# Altium PCB OK6410AV2.PcbDoc (part 1 of 4)
Units mm, origin at the board's own origin, x right, y up, seen from the top; angles counter-clockwise.
Board outline 144.31 x 105.28 mm, 4 copper layers (Top, GND, VCC, Bottom), stack 0.899 mm thick; 254 components, 278 nets, 1261 pads, 740 vias.
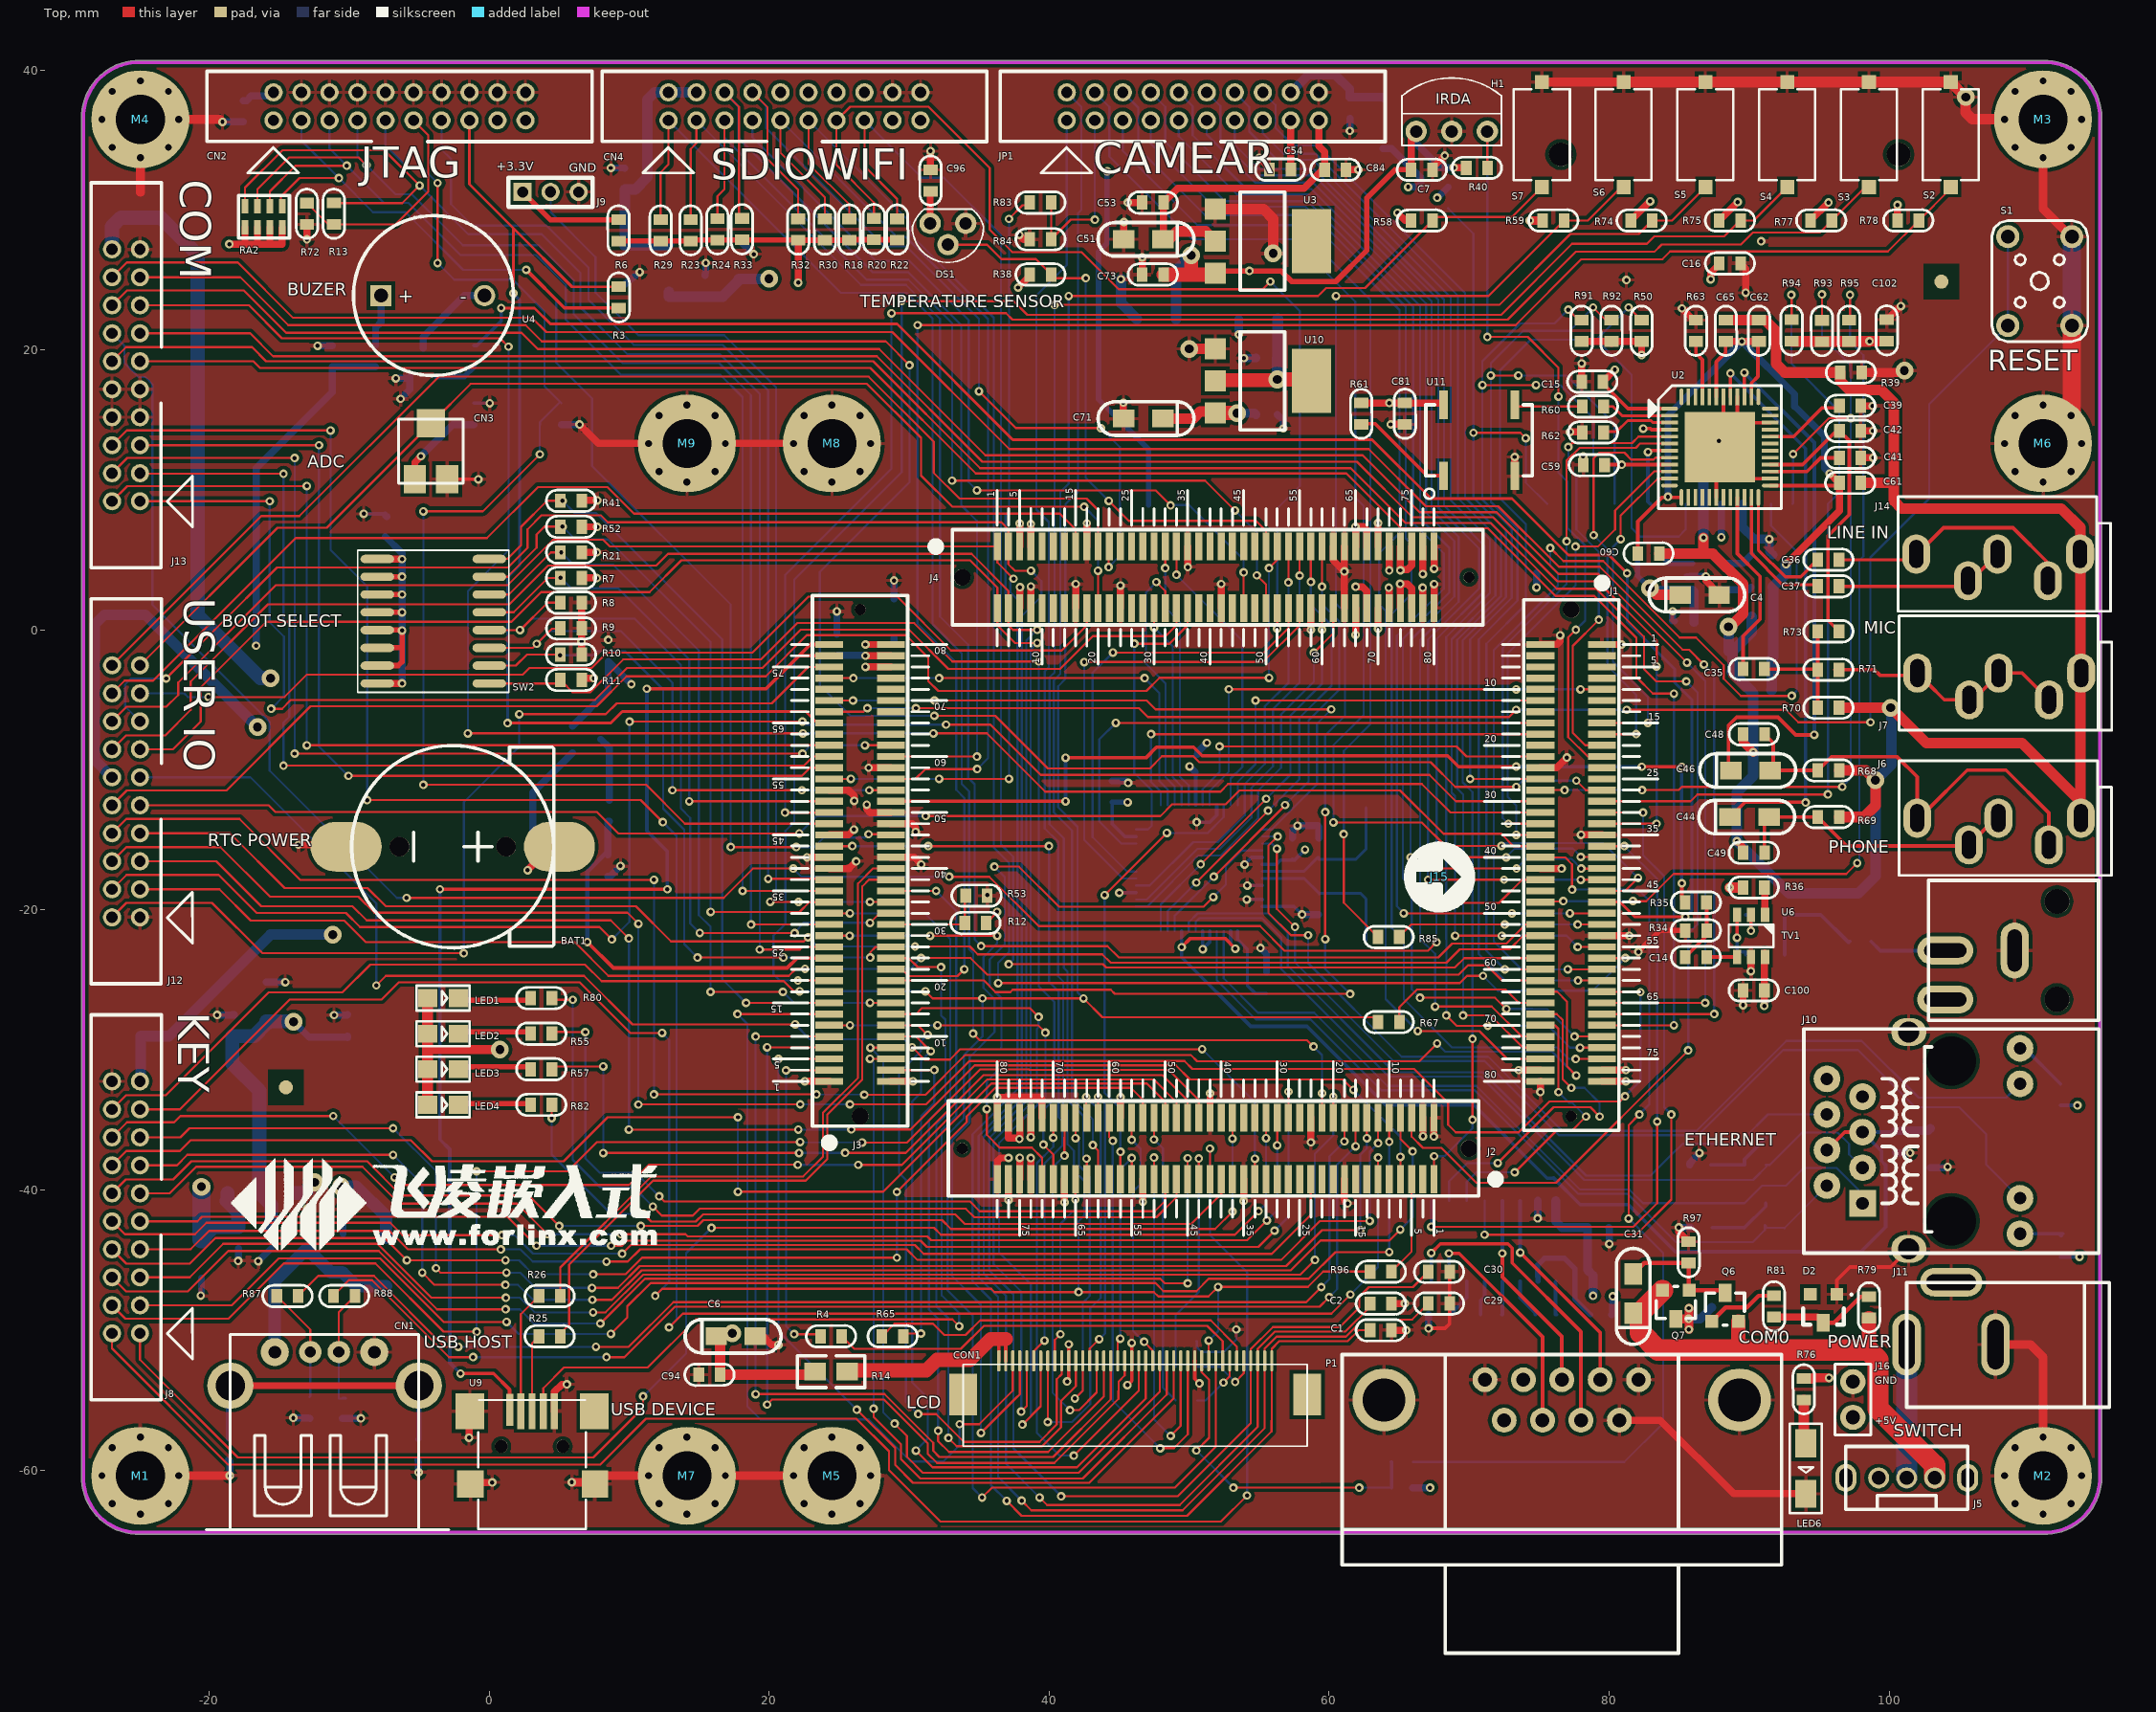
[diagram p0: Top view]
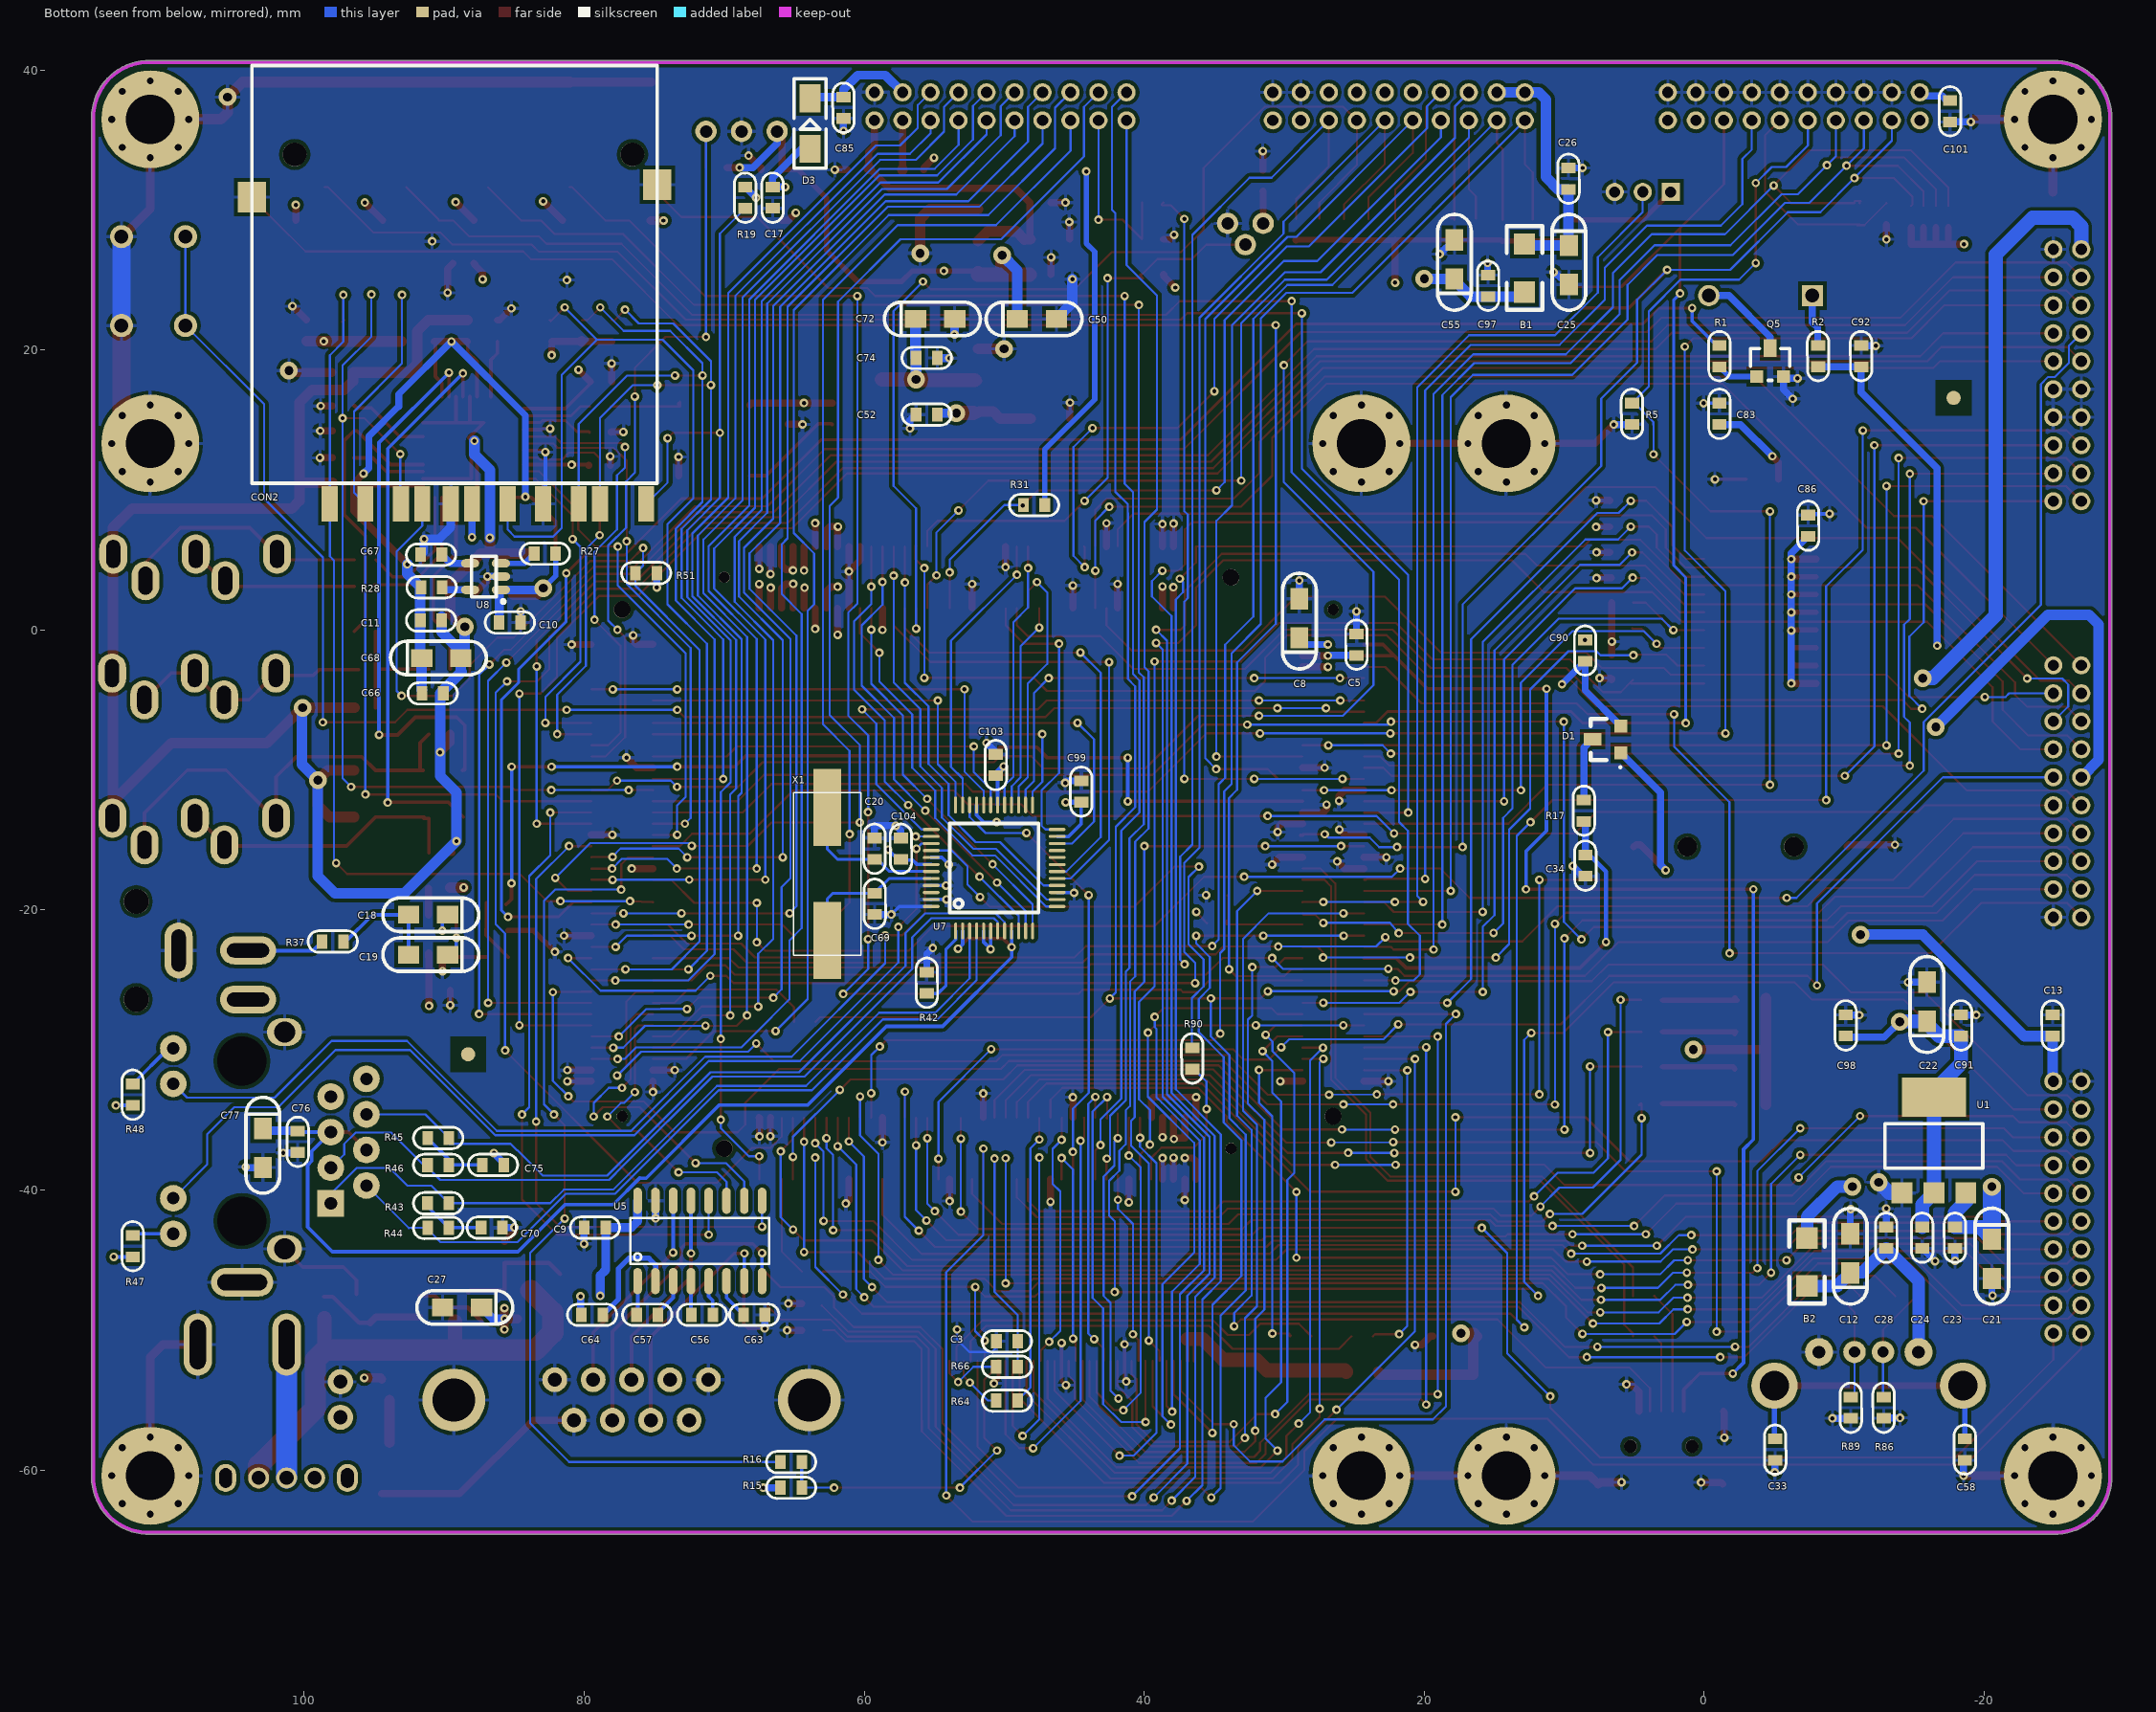
[diagram p1: Bottom view, seen from below]
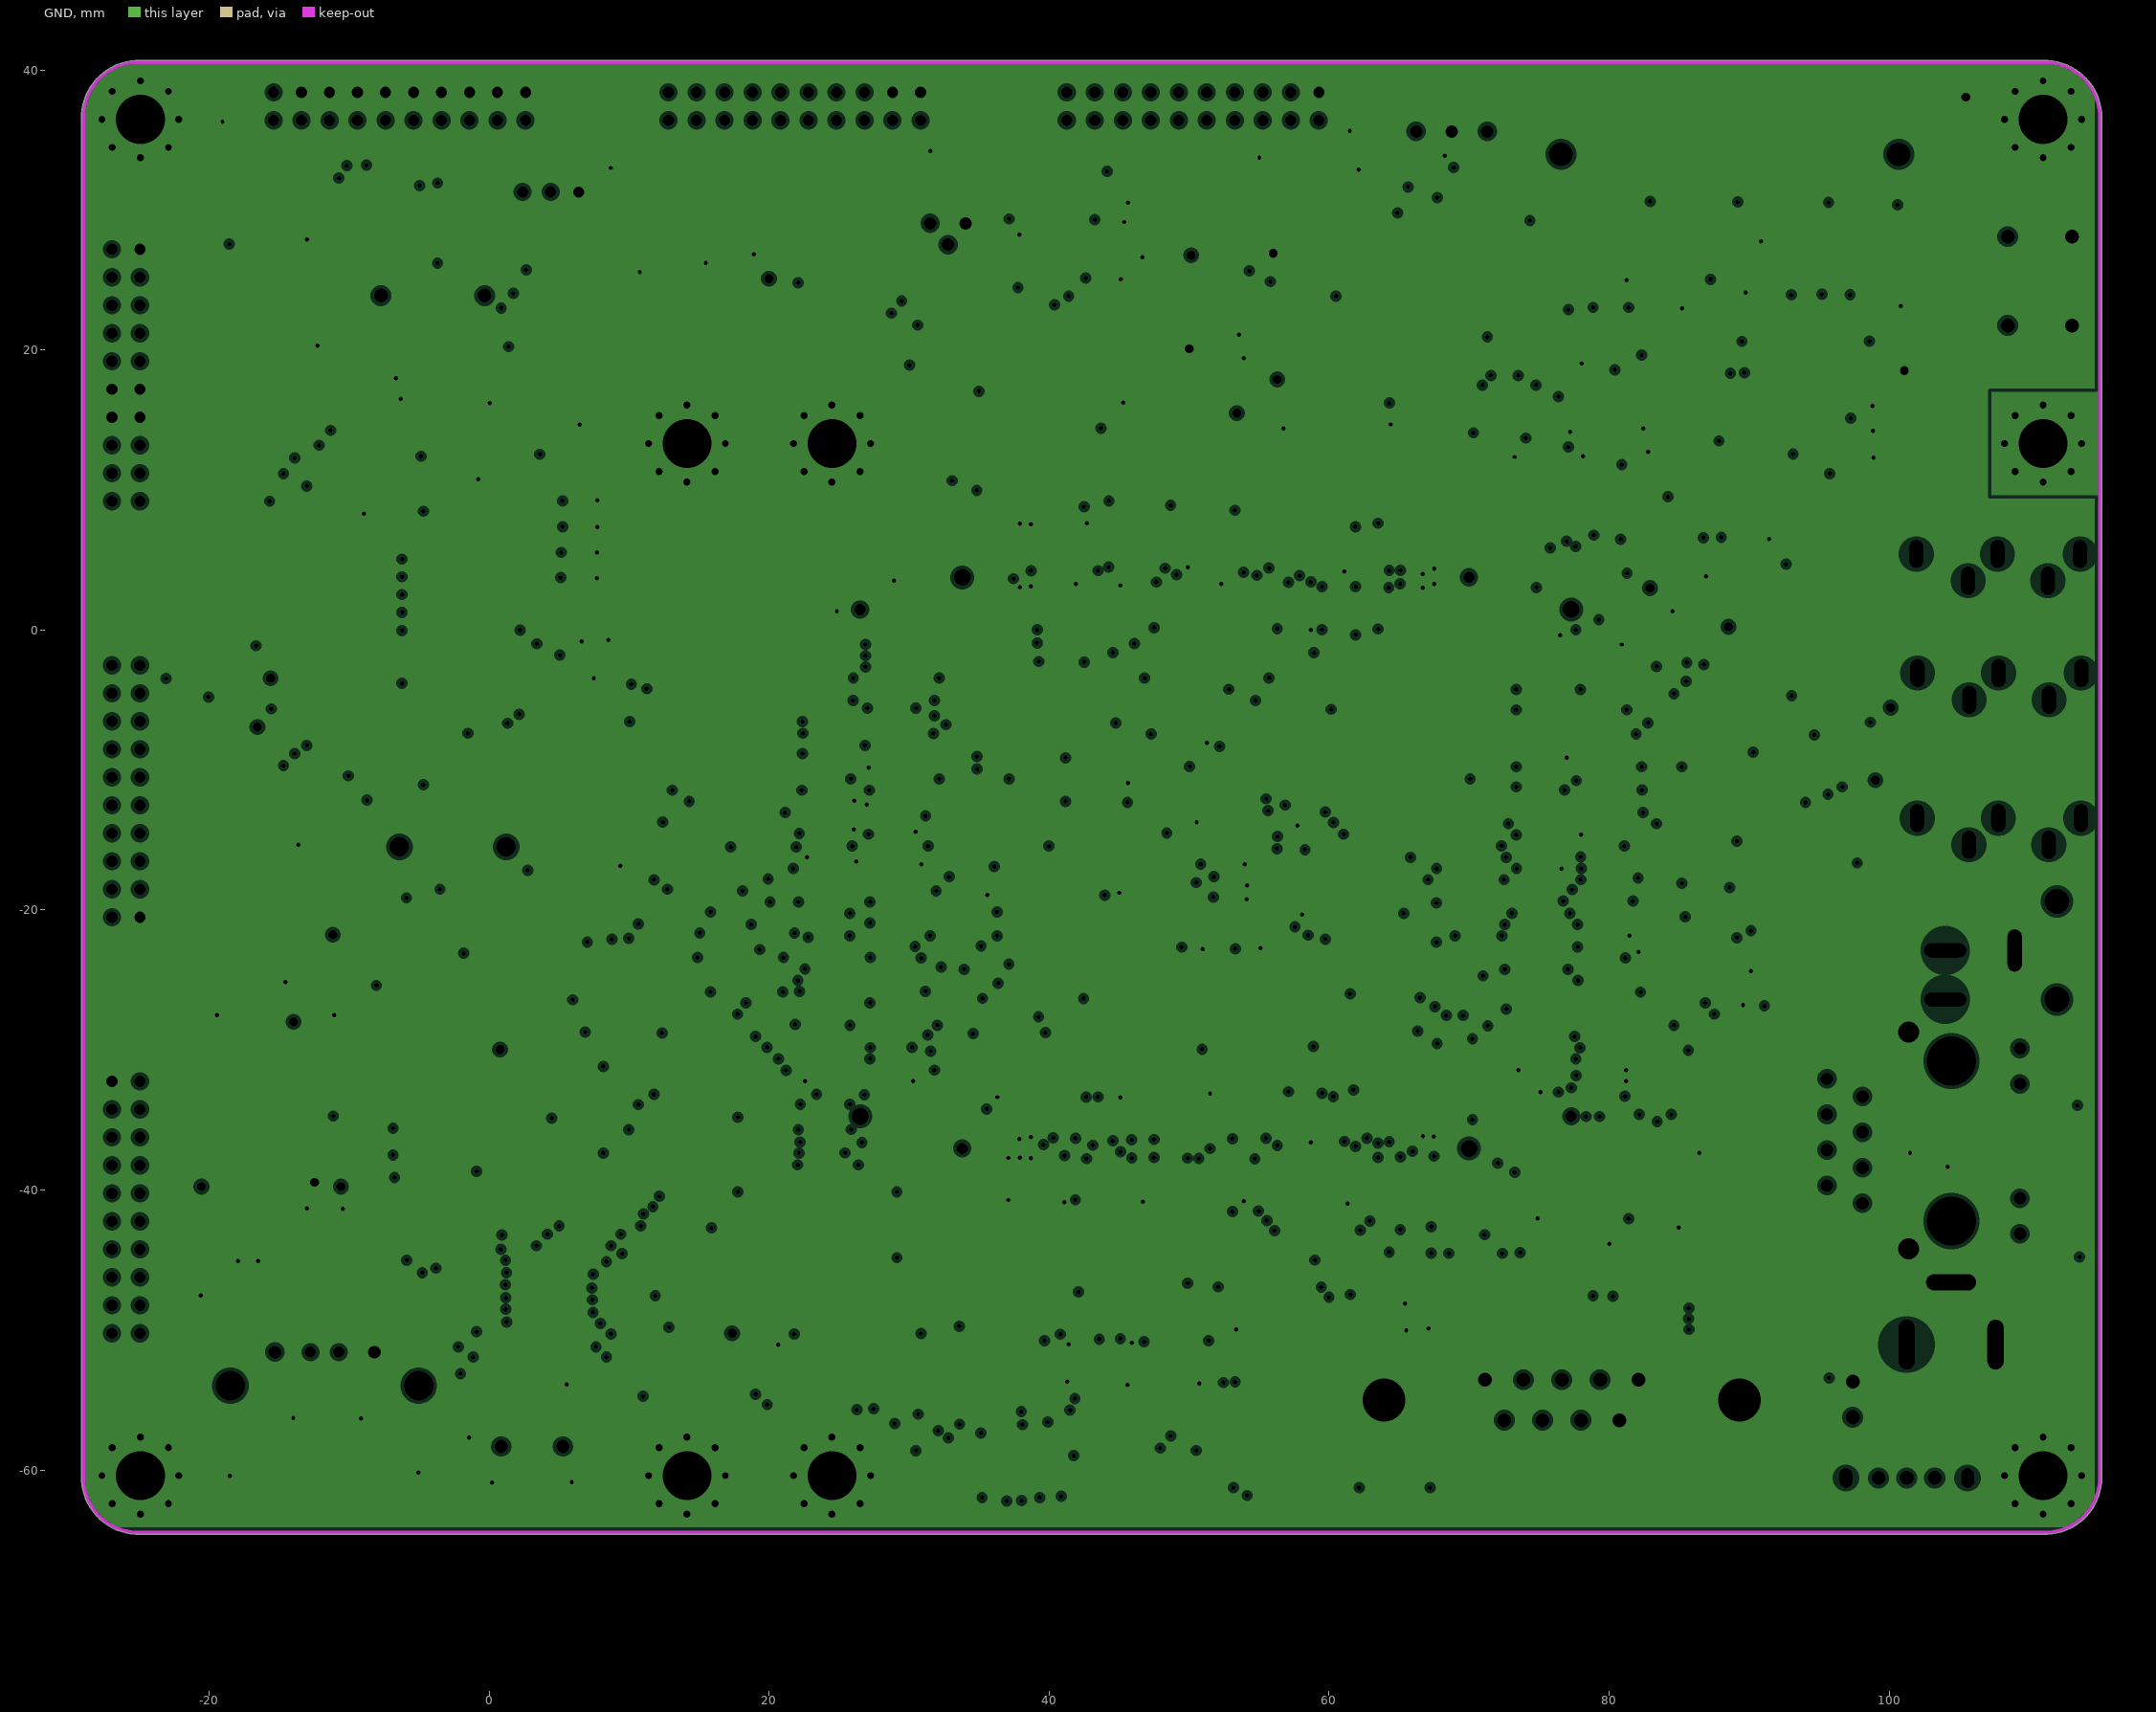
[diagram p2: GND, clearances drawn from the general rule]
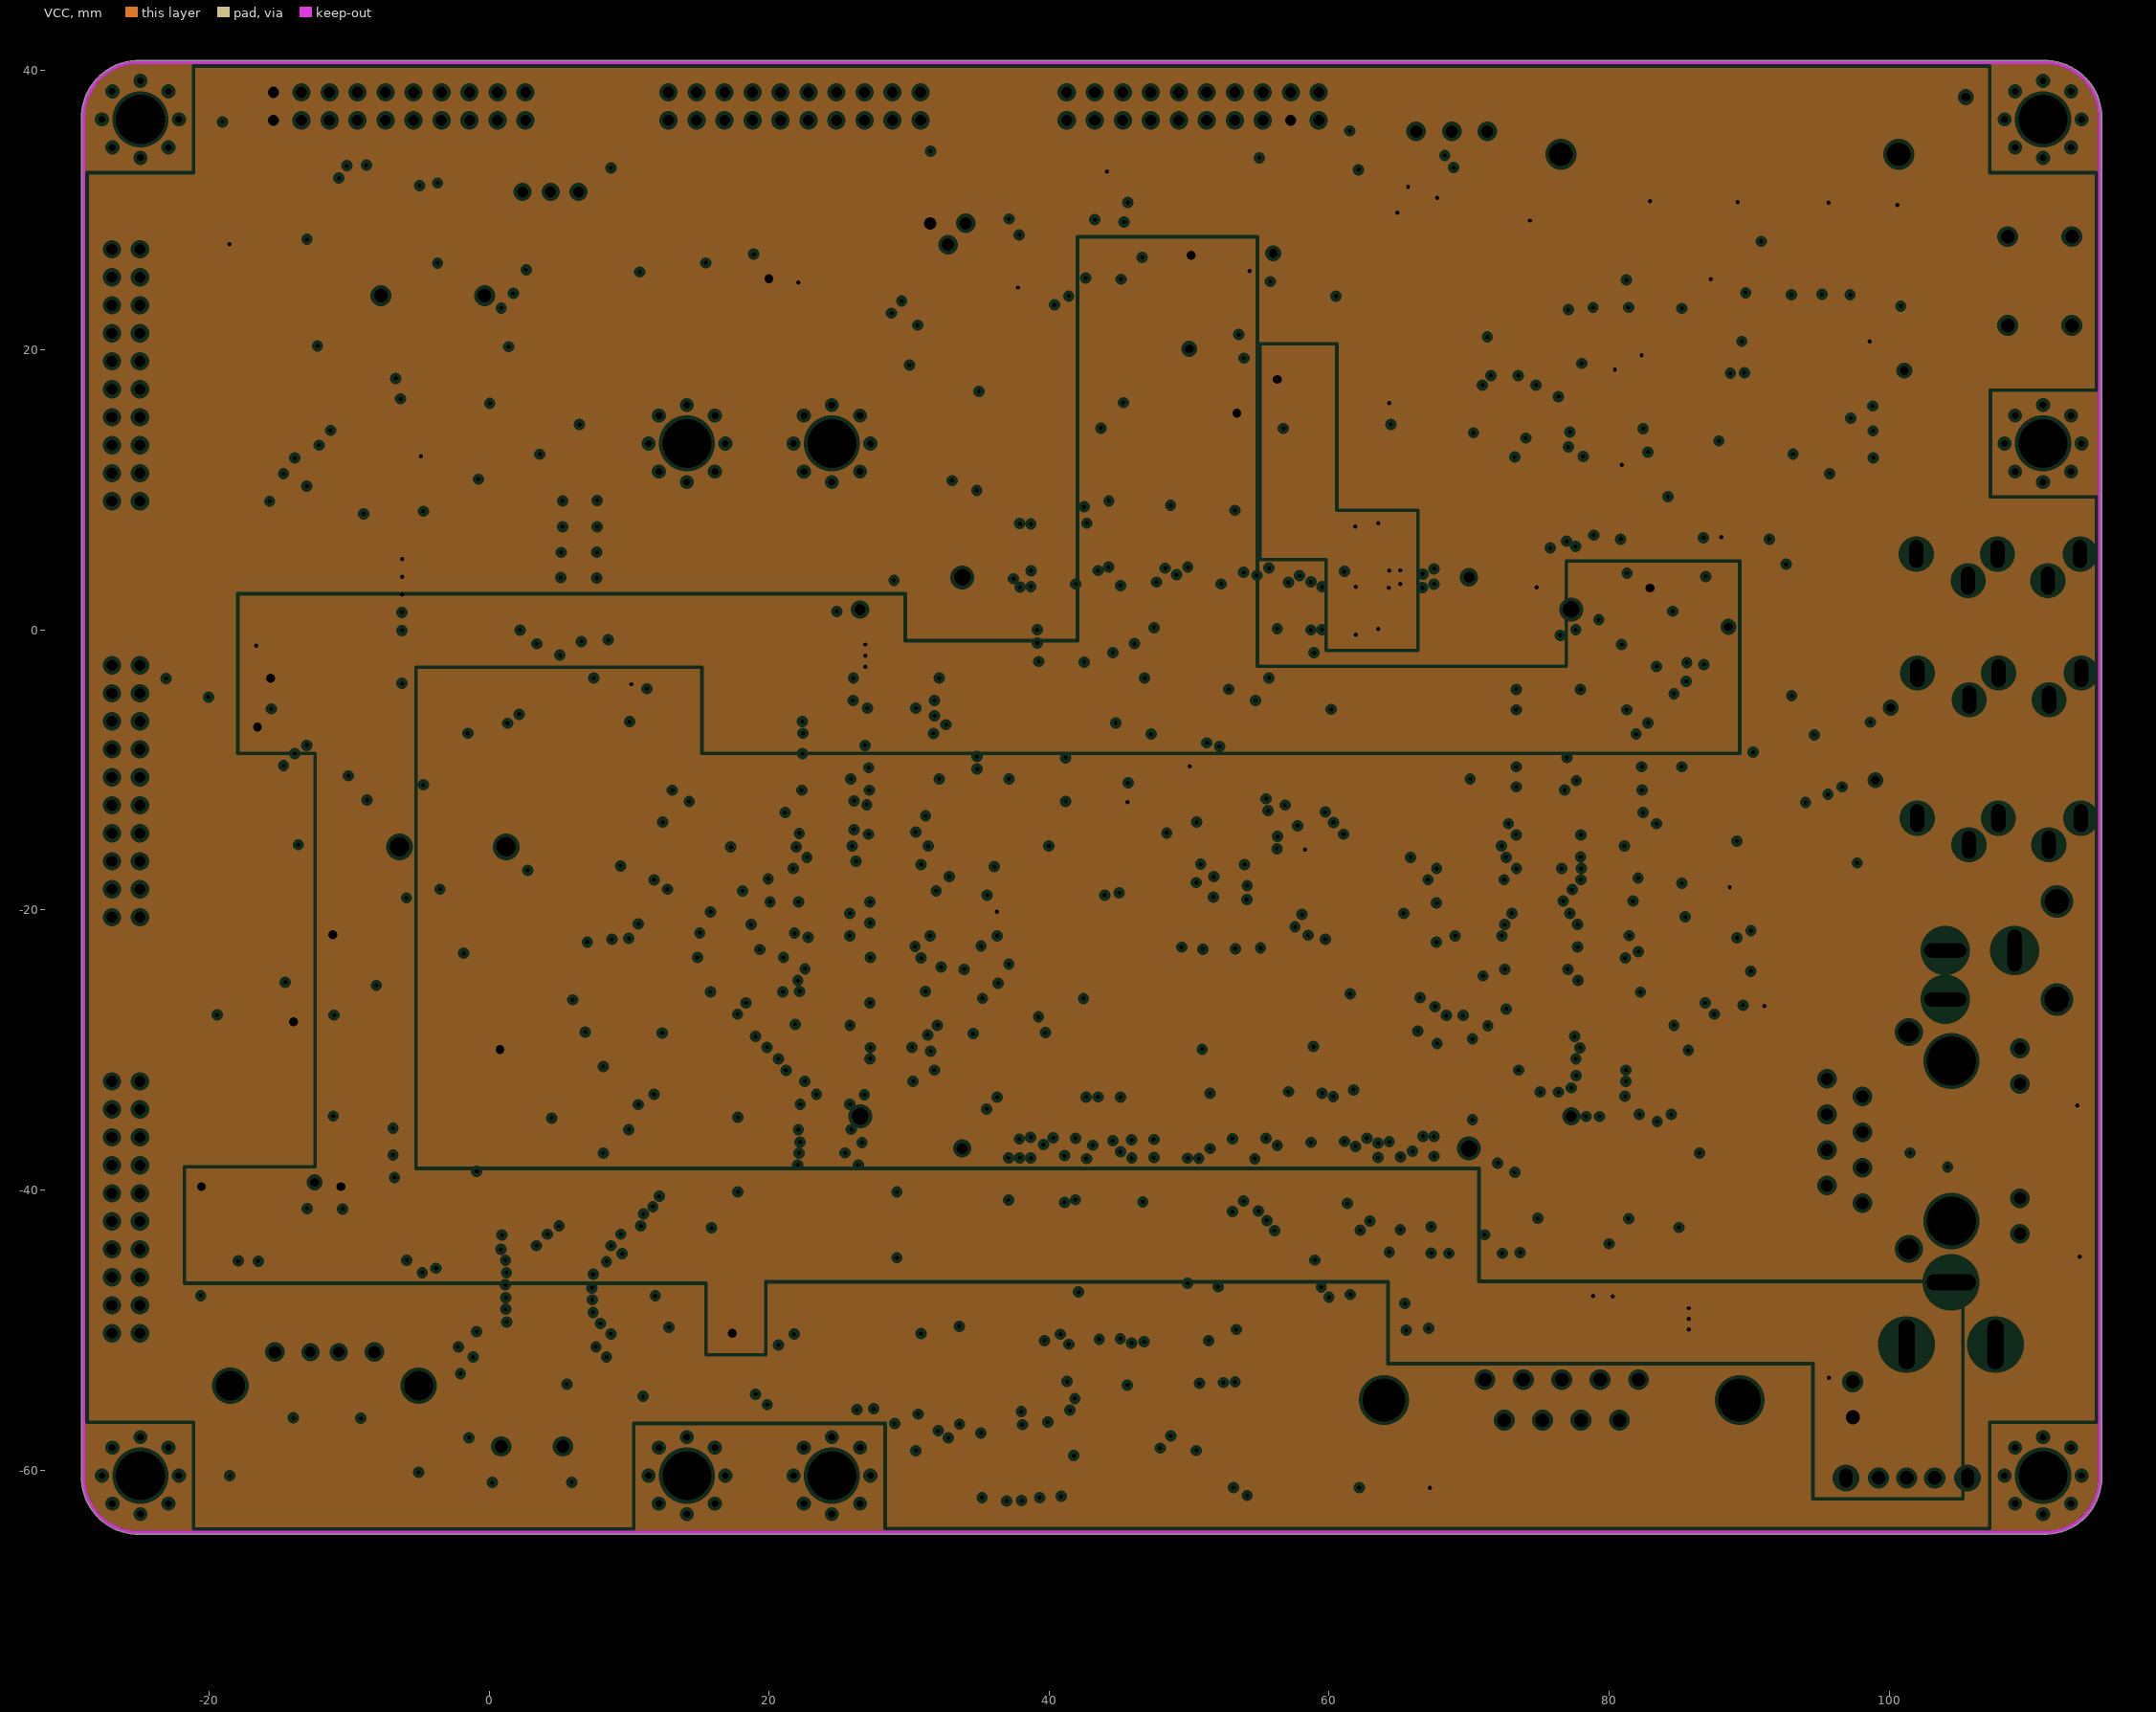
[diagram p3: VCC, clearances drawn from the general rule]

## Layer stack, top to bottom
Top: signal copper 0.0343
Dielectric: dielectric 0.254, FR-4, Dk 4.3
GND: plane copper 0.0343, net GND
Dielectric: dielectric 0.254, FR-4, Dk 4.3
VCC: plane copper 0.0343
Dielectric: dielectric 0.254, FR-4, Dk 4.3
Bottom: signal copper 0.0343

## Board outline
-29.124,36.49 -29.124,-60.399 ccw(c-25.062,-60.53) -24.931,-64.592 110.989,-64.592 ccw(c111.12,-60.53) 115.184,-60.53 115.182,-60.399 115.182,36.49 115.184,36.621 ccw(c111.12,36.621) 111.018,40.684 110.991,40.687 -24.931,40.683 ccw(c-25.062,36.621)

## Design rules (kind name [scope] priority, off if disabled: settings)
Clearance "'Default' PADS rule_19" [InPolygon] p1: gap=0.254
Clearance "'Default' PADS rule_20" [All] p2: gap=0.127
Clearance "'Default' PADS rule_18" [All] p3: gap=0.127
Clearance "'Default' PADS rule_15" [IsVia vs IsVia] p4: gap=0.152
ComponentClearance "'Default' PADS rule_12" [All] p1: gap=0 collisioncheckmode=3 verticalgap=0 showdistances=FALSE
FlightTimeFalling "'Default' PADS rule_10" [All] p1: maximum=10.00
FlightTimeRising "'Default' PADS rule_9" [All] p1: maximum=10.00
HoleSize [All] p1: absolutevalues=TRUE maxlimit=5.08 minlimit=0.025 maxpercent=80.000 minpercent=20.000
Length "'Default' PADS rule_5" [All] p1: maxlimit=1270 minlimit=0
MatchedLengths "'Default' PADS rule_11" [InNetClass('All Nets')] p1: tolerance=5.08 checknetsindiffpair=TRUE checkdiffpairvsdiffpair=TRUE checkothers=TRUE
MaxMinImpedance "'Default' PADS rule_8" [All] p1: minimum=50.00 maximum=150.0
MinimumSolderMaskSliver [All] p1: minsoldermaskwidth=0
ParallelSegment "'Default' PADS rule_7" [All] p1: limit=25.4 gap=5.08
ParallelSegment "'Default' PADS rule_6" [All] p2: limit=25.4 gap=5.08
PlaneClearance "'Default' PADS rule_14" [All] p1: clearance=0.254
PlaneConnect "Power Plane Connect Style - pads with no thermal_22" [(Name='M8-7') Or (Name='M8-8') Or (Name='M8-9') Or (Name='M9-1') Or (Name='M9-2') Or (Name='M9-3') Or (Name='M9-4') Or (Name='M9-5') Or (Name='M9-6') Or (Name='M9-7') Or (Name='M9-8') Or (Name='M9-9') Or (Name='P1-4') Or (Name='P1-9') Or (Name='P1-10') Or (Name='P1-11') Or (Name='TV1-3') Or (Name='TV1-4') Or (Name='U9-9') Or (Name='U9-10')] p1: planeconnectstyle=NoConnect reliefexpansion=0.508 reliefentries=4 reliefconductorwidth=0.254 reliefairgap=0.254 // PAD - No Thermal Connect Rule
PlaneConnect "Power Plane Connect Style - pads with no thermal_21" [(Name='M2-4') Or (Name='M2-5') Or (Name='M2-6') Or (Name='M2-7') Or (Name='M2-8') Or (Name='M2-9') Or (Name='M3-1') Or (Name='M3-2') Or (Name='M3-3') Or (Name='M3-4') Or (Name='M3-5') Or (Name='M3-6') Or (Name='M3-7') Or (Name='M3-8') Or (Name='M3-9') Or (Name='M4-1') Or (Name='M4-2') Or (Name='M4-3') Or (Name='M4-4') Or (Name='M4-5') Or (Name='M4-6') Or (Name='M4-7') Or (Name='M4-8') Or (Name='M4-9') Or (Name='M5-1') Or (Name='M5-2') Or (Name='M5-3') Or (Name='M5-4') Or (Name='M5-5') Or (Name='M5-6') Or (Name='M5-7') Or (Name='M5-8') Or (Name='M5-9') Or (Name='M6-1') Or (Name='M6-2') Or (Name='M6-3') Or (Name='M6-4') Or (Name='M6-5') Or (Name='M6-6') Or (Name='M6-7') Or (Name='M6-8') Or (Name='M6-9') Or (Name='M7-1') Or (Name='M7-2') Or (Name='M7-3') Or (Name='M7-4') Or (Name='M7-5') Or (Name='M7-6') Or (Name='M7-7') Or (Name='M7-8') Or (Name='M7-9') Or (Name='M8-1') Or (Name='M8-2') Or (Name='M8-3') Or (Name='M8-4') Or (Name='M8-5') Or (Name='M8-6')] p2: planeconnectstyle=NoConnect reliefexpansion=0.508 reliefentries=4 reliefconductorwidth=0.254 reliefairgap=0.254 // PAD - No Thermal Connect Rule
PlaneConnect "Power Plane Connect Style - pads with no thermal" [(Name='BAT1-3') Or (Name='BAT1-4') Or (Name='CN1-1') Or (Name='CN2-3') Or (Name='CN2-5') Or (Name='CN2-7') Or (Name='CN2-9') Or (Name='CN2-13') Or (Name='CN2-15') Or (Name='CN2-17') Or (Name='CN2-19') Or (Name='DS1-2') Or (Name='J1-81') Or (Name='J1-82') Or (Name='J10-7') Or (Name='J10-8') Or (Name='J10-15') Or (Name='J10-16') Or (Name='J2-81') Or (Name='J2-82') Or (Name='J3-81') Or (Name='J3-82') Or (Name='J4-81') Or (Name='J4-82') Or (Name='J5-3') Or (Name='J5-4') Or (Name='J5-5') Or (Name='J9-2') Or (Name='JP1-1') Or (Name='JP1-2') Or (Name='JP1-4') Or (Name='JP1-6') Or (Name='JP1-7') Or (Name='JP1-8') Or (Name='JP1-9') Or (Name='JP1-10') Or (Name='JP1-11') Or (Name='JP1-12') Or (Name='JP1-13') Or (Name='JP1-14') Or (Name='JP1-15') Or (Name='JP1-16') Or (Name='M1-1') Or (Name='M1-2') Or (Name='M1-3') Or (Name='M1-4') Or (Name='M1-5') Or (Name='M1-6') Or (Name='M1-7') Or (Name='M1-8') Or (Name='M1-9') Or (Name='M2-1') Or (Name='M2-2') Or (Name='M2-3')] p3: planeconnectstyle=NoConnect reliefexpansion=0.508 reliefentries=4 reliefconductorwidth=0.254 reliefairgap=0.254 // PAD - No Thermal Connect Rule
PlaneConnect "Power Plane Connect Style - from global settings" [All] p4: planeconnectstyle=Relief reliefexpansion=0.508 reliefentries=4 reliefconductorwidth=0.381 reliefairgap=0.254
PolygonConnect [All] p1: connectstyle=Relief reliefconductorwidth=0.254 reliefentries=4 polygonreliefangle="90 Angle"
RoutingLayers "'Default' PADS rule_3" [All] p1: top layer_v5=TRUE bottom layer_v5=TRUE
RoutingPriority "'Default' PADS rule_2" [All] p1: routingpriority=3
RoutingTopology "'Default' PADS rule" [All] p1: topology=Shortest
RoutingVias "'Default' PADS rule_4" [All] p1: holewidth=0.305 width=0.61 viastyle="Through Hole" minholewidth=0.305 minwidth=0.61 maxholewidth=0.762 maxwidth=1.524
SMDToCorner "'Default' PADS rule_16" [All] p1: distance=60000
SMDToPlane "'Default' PADS rule_17" [All] p1: distance=60000
SilkToSilkClearance [All] p1: silktosilkclearance=0
SilkscreenOverComponentPads [All] p1: minsilkscreentomaskgap=0
SolderMaskExpansion "Solder Mask Expansion from CAM settings" [All] p1: expansion=0.127
Width "'Default' PADS rule_13" [All] p1: maxlimit=2.54 minlimit=0.152 preferedwidth=0.152
18 further rules are at their usual default settings.

## Components (designator, comment, footprint, x,y, rotation, side; value= is the part's Value field where it differs from the comment)
B1 "1206" 1206 12.83,24.149 r90 bottom
B2 "1206" 1206 -7.363,-43.423 r270 bottom
BAT1 "BATTERY2" BATTERY2 5.01,-15.476 r0 top
C1 "0603A" 0603A 62.919,-50.03 r0 top
C2 "0603A" 0603A 62.919,-48.128 r0 top
C3 "0603A" 0603A 49.022,-50.794 r0 bottom
C4 "3216A" 3216A 85.069,2.52 r180 top
C5 "0603A" 0603A 24.818,-1.816 r90 bottom
C6 "3216A" 3216A 16.221,-50.441 r180 top
C7 "0603A" 0603A 65.849,32.873 r0 top
C8 "3216A" 3216A 28.913,-0.552 r270 bottom
C9 "0603A" 0603A 78.454,-42.671 r0 bottom
C10 "0603A" 0603A 86.081,0.533 r180 bottom
C11 "0603A" 0603A 91.707,0.682 r180 bottom
C12 "3216A" 3216A -10.441,-45.917 r270 bottom
C13 "0603A" 0603A -24.909,-29.016 r90 bottom
C14 "0603A" 0603A 86.97,-23.355 r180 top
C15 "0603A" 0603A 79.571,17.757 r180 top
C16 "0603A" 0603A 87.857,26.181 r0 top
C17 "0603A" 0603A 66.549,31.662 r270 bottom
C18 "3216A" 3216A 89.758,-20.343 r180 bottom
C19 "3216A" 3216A 89.758,-23.188 r180 bottom
C20 "0603A" 0603A 59.271,-14.849 r270 bottom
C21 "3216A" 3216A -20.567,-43.525 r90 bottom
C22 "3216A" 3216A -15.916,-27.94 r270 bottom
C23 "0603A" 0603A -17.913,-42.634 r270 bottom
C24 "0603A" 0603A -15.574,-42.634 r270 bottom
C25 "3216A" 3216A 9.645,27.474 r90 bottom
C26 "0603A" 0603A 9.668,31.472 r90 bottom
C27 "3216A" 3216A 87.329,-48.393 r180 bottom
C28 "0603A" 0603A -13.027,-44.179 r90 bottom
C29 "0603A" 0603A 67.074,-48.119 r0 top
C30 "0603A" 0603A 67.074,-45.858 r0 top
C31 "3216A" 3216A 81.712,-48.793 r270 top
C33 "0603A" 0603A -5.07,-57.77 r270 bottom
C34 "0603A" 0603A 8.487,-16.053 r270 bottom
C35 "0603A" 0603A 89.558,-2.794 r0 top
C36 "0603A" 0603A 94.887,5.014 r0 top
C37 "0603A" 0603A 94.887,3.119 r0 top
C39 "0603A" 0603A 96.449,16.012 r0 top
C41 "0603A" 0603A 96.449,12.296 r0 top
C42 "0603A" 0603A 96.449,14.219 r0 top
C44 "3216A" 3216A 88.636,-13.35 r180 top
C46 "3216A" 3216A 88.702,-10.018 r180 top
C48 "0603A" 0603A 91.105,-7.427 r180 top
C49 "0603A" 0603A 91.105,-15.885 r180 top
C50 "3216A" 3216A 49.056,22.234 r0 bottom
C51 "3216A" 3216A 48.111,27.915 r0 top
C52 "0603A" 0603A 54.758,15.406 r0 bottom
C53 "0603A" 0603A 48.174,30.554 r180 top
C54 "0603A" 0603A 57.265,32.901 r180 top
C55 "3216A" 3216A 17.836,25.081 r270 bottom
C56 "0603A" 0603A 70.805,-48.898 r0 bottom
C57 "0603A" 0603A 74.722,-48.898 r0 bottom
C58 "0603A" 0603A -18.623,-57.77 r270 bottom
C59 "0603A" 0603A 79.675,11.793 r180 top
C60 "0603A" 0603A 82.042,5.461 r0 top
C61 "0603A" 0603A 96.449,10.503 r0 top
C62 "0603A" 0603A 90.717,20.612 r90 top
C63 "0603A" 0603A 68.626,-48.92 r180 bottom
C64 "0603A" 0603A 80.206,-48.919 r180 bottom
C65 "0603A" 0603A 88.352,20.612 r90 top
C66 "0603A" 0603A 91.595,-4.525 r180 bottom
C67 "0603A" 0603A 90.162,5.396 r0 bottom
C68 "3216A" 3216A 91.606,-1.985 r0 bottom
C69 "0603A" 0603A 59.231,-20.325 r90 bottom
C70 "0603A" 0603A 85.835,-42.671 r0 bottom
C71 "3216A" 3216A 48.111,15.102 r0 top
C72 "3216A" 3216A 56.323,22.234 r0 bottom
C73 "0603A" 0603A 48.174,25.414 r180 top
C74 "0603A" 0603A 56.303,19.433 r180 bottom
C75 "0603A" 0603A 85.738,-38.195 r0 bottom
C76 "0603A" 0603A 100.45,-37.323 r90 bottom
C77 "3216A" 3216A 102.949,-35.603 r90 bottom
C81 "0603A" 0603A 65.398,16.229 r270 top
C83 "0603A" 0603A -1.109,14.677 r90 bottom
C84 "0603A" 0603A 59.668,32.875 r0 top
C85 "0603A" 0603A 61.463,36.541 r90 bottom
C86 "0603A" 0603A -7.447,6.684 r90 bottom
C90 "0603A" 0603A 8.481,-2.233 r90 bottom
C91 "0603A" 0603A -18.372,-29.014 r90 bottom
C92 "0603A" 0603A -11.234,18.797 r90 bottom
C94 "0603A" 0603A 16.503,-53.181 r180 top
C96 "0603A" 0603A 31.535,31.337 r90 top
C97 "0603A" 0603A 15.413,23.819 r90 bottom
C98 "0603A" 0603A -10.109,-27.469 r270 bottom
C99 "0603A" 0603A 44.505,-10.765 r270 bottom
C100 "0603A" 0603A 89.558,-25.751 r0 top
C101 "0603A" 0603A -17.585,36.291 r90 bottom
C102 "0603A" 0603A 99.822,22.182 r270 top
C103 "0603A" 0603A 50.604,-8.866 r270 bottom
C104 "0603A" 0603A 57.38,-14.85 r270 bottom
CN1 "USB-B2" USB-B2 -8.209,-51.575 r270 top
CN2 "IDC20S" IDC20S -15.423,36.438 r0 top
CN3 "AD01" 3314J-1 -4.166,12.776 r0 top
CN4 "IDC20S" IDC20S 12.795,36.438 r0 top
CON1 "FPC40" FPC40 55.896,-52.199 r180 top
CON2 "SD-CARD" SD-CARD2 86.716,8.966 r0 bottom
D1 "Comment" SOT23 7.976,-7.798 r0 bottom
D2 "Comment" SOT23 95.301,-49.479 r270 top
D3 "LED1206NB" LED1206NB 63.856,36.188 r270 bottom
DS1 "DSAAAA" DSAAAA 31.495,28.804 r0 top
H1 "HY01" HY01 68.757,35.626 r180 top
J1 "CON80A_08_D" CON80A_08_D 79.488,-1.031 r0 top
J2 "CON80A_08_D" CON80A_08_D 67.489,-39.231 r270 top
J3 "CON80A_08_D" CON80A_08_D 24.289,-32.231 r180 top
J4 "CON80A_08_D" CON80A_08_D 36.29,5.969 r90 top
J5 "SWITCH_A" SWITCH_A 105.611,-58.315 r180 top
J6 "PHONE1" PHONE1 113.704,-13.432 r0 top
J7 "PHONE1" PHONE1 113.723,-3.073 r0 top
J8 "IDC20S" IDC20S -24.975,-50.245 r90 top
J9 "SIP3S" SIP3S 4.382,31.298 r0 top
J10 "RJ-45A12" RJ-45A12 109.35,-43.127 r0 top
J11 "JACK-2.5MM_B" JACK-2.5MM_B 101.253,-51.036 r270 top
J12 "IDC20S" IDC20S -24.975,-20.527 r90 top
J13 "IDC20S" IDC20S -24.975,9.195 r90 top
J14 "PHONE1" PHONE1 113.64,5.436 r0 top
J15 "ZSB" ZSB 67.885,-17.635 r0 top
J16 "Comment" RAD-0.1 97.409,-56.236 r90 top
JP1 "IDC20S" IDC20S 41.248,36.438 r0 top
LED1 "LEDX" LEDX -3.309,-26.289 r0 top
LED2 "LEDX" LEDX -3.309,-28.829 r0 top
LED3 "LEDX" LEDX -3.309,-31.369 r0 top
LED4 "LEDX" LEDX -3.309,-33.909 r0 top
LED6 "LEDXA" LEDXA 94.056,-59.893 r270 top
M1 "HOLE157-8STAR" HOLE157-8STAR -24.933,-60.401 r0 top
M2 "HOLE157-8STAR" HOLE157-8STAR 110.991,-60.401 r0 top
M3 "HOLE157-8STAR" HOLE157-8STAR 110.991,36.492 r0 top
M4 "HOLE157-8STAR" HOLE157-8STAR -24.933,36.492 r0 top
M5 "HOLE157-8STAR" HOLE157-8STAR 24.472,-60.401 r0 top
M6 "HOLE157-8STAR" HOLE157-8STAR 110.991,13.335 r0 top
M7 "HOLE157-8STAR" HOLE157-8STAR 14.115,-60.401 r0 top
M8 "HOLE157-8STAR" HOLE157-8STAR 24.472,13.335 r0 top
M9 "HOLE157-8STAR" HOLE157-8STAR 14.115,13.335 r0 top
P1 "DB9-HF" DB9-HF 76.615,-66.784 r0 top
Q5 "SOT23T" SOT23T -4.721,20.143 r180 bottom
Q6 "SOT23T" SOT23T 88.278,-47.346 r0 top
Q7 "SOT23T" SOT23T 84.76,-49.2 r180 top
R1 "0603A" 0603A -1.109,18.797 r90 bottom
R2 "0603A" 0603A -8.14,20.344 r270 bottom
R3 "0603A" 0603A 9.244,24.54 r270 top
R4 "0603A" 0603A 25.19,-50.436 r180 top
R5 "0603A" 0603A 5.134,14.677 r90 bottom
R6 "0603A" 0603A 9.223,29.326 r270 top
R7 "0603A" 0603A 5.07,3.719 r0 top
R8 "0603A" 0603A 5.07,1.951 r0 top
R9 "0603A" 0603A 5.07,0.114 r0 top
R10 "0603A" 0603A 5.07,-1.768 r0 top
R11 "0603A" 0603A 5.07,-3.571 r0 top
R12 "0603A" 0603A 35.505,-20.914 r180 top
R13 "0603A" 0603A -11.117,30.517 r270 top
R14 "0805" 0805 24.418,-52.973 r0 top
R15 "0603A" 0603A 64.444,-61.25 r0 bottom
R16 "0603A" 0603A 64.443,-59.419 r0 bottom
R17 "0603A" 0603A 8.572,-13.675 r90 bottom
R18 "0603A" 0603A 25.715,29.385 r270 top
R19 "0603A" 0603A 68.484,30.116 r90 bottom
R20 "0603A" 0603A 27.471,29.418 r270 top
R21 "0603A" 0603A 5.07,5.537 r0 top
R22 "0603A" 0603A 29.129,29.385 r270 top
R23 "0603A" 0603A 14.374,29.326 r270 top
R24 "0603A" 0603A 16.287,29.393 r270 top
R25 "0603A" 0603A 5.083,-50.437 r180 top
R26 "0603A" 0603A 5.083,-47.559 r180 top
R27 "0603A" 0603A 83.574,5.45 r180 bottom
R28 "0603A" 0603A 91.669,3.048 r180 bottom
R29 "0603A" 0603A 12.228,29.326 r270 top
R30 "0603A" 0603A 23.963,29.383 r270 top
R31 "0603A" 0603A 48.633,8.92 r180 bottom
R32 "0603A" 0603A 22.055,29.383 r270 top
R33 "0603A" 0603A 18.045,29.411 r270 top
R34 "0603A" 0603A 86.97,-21.448 r180 top
R35 "0603A" 0603A 85.423,-19.474 r0 top
R36 "0603A" 0603A 89.558,-18.4 r0 top
R37 "0603A" 0603A 97.186,-22.234 r0 bottom
R38 "0603A" 0603A 40.148,25.414 r180 top
R39 "0603A" 0603A 98.044,18.415 r180 top
R40 "0603A" 0603A 71.325,33.03 r180 top
R41 "0603A" 0603A 5.07,9.228 r0 top
R42 "0603A" 0603A 55.513,-25.967 r90 bottom
R43 "0603A" 0603A 91.199,-40.951 r180 bottom
R44 "0603A" 0603A 89.652,-42.694 r0 bottom
R45 "0603A" 0603A 89.652,-36.272 r0 bottom
R46 "0603A" 0603A 91.199,-38.218 r180 bottom
R47 "0603A" 0603A 112.235,-44.785 r90 bottom
R48 "0603A" 0603A 112.258,-32.421 r270 bottom
R50 "0603A" 0603A 82.303,22.16 r270 top
R51 "0603A" 0603A 76.342,4.064 r180 bottom
R52 "0603A" 0603A 5.07,7.366 r0 top
R53 "0603A" 0603A 34.034,-18.976 r0 top
R55 "0603A" 0603A 4.486,-28.819 r180 top
R57 "0603A" 0603A 4.486,-31.359 r180 top
R58 "0603A" 0603A 65.85,29.247 r0 top
R59 "0603A" 0603A 75.243,29.248 r0 top
R60 "0603A" 0603A 78.075,15.964 r0 top
R61 "0603A" 0603A 62.28,16.229 r270 top
R62 "0603A" 0603A 78.075,14.112 r0 top
R63 "0603A" 0603A 86.208,20.612 r90 top
R64 "0603A" 0603A 50.569,-55.051 r180 bottom
R65 "0603A" 0603A 28.042,-50.459 r0 top
R66 "0603A" 0603A 50.569,-52.633 r180 bottom
R67 "0603A" 0603A 65.024,-27.994 r180 top
R68 "0603A" 0603A 96.434,-10.013 r180 top
R69 "0603A" 0603A 96.434,-13.345 r180 top
R70 "0603A" 0603A 94.887,-5.56 r0 top
R71 "0603A" 0603A 94.887,-2.845 r0 top
R72 "0603A" 0603A -13.017,28.97 r90 top
R73 "0603A" 0603A 94.887,-0.104 r0 top
R74 "0603A" 0603A 81.547,29.248 r0 top
R75 "0603A" 0603A 87.857,29.248 r0 top
R76 "0603A" 0603A 93.893,-53.459 r270 top
R77 "0603A" 0603A 94.377,29.248 r0 top
R78 "0603A" 0603A 100.597,29.248 r0 top
R79 "0603A" 0603A 98.577,-49.149 r90 top
R80 "0603A" 0603A 4.486,-26.279 r180 top
R81 "0603A" 0603A 91.781,-49.081 r90 top
R82 "0603A" 0603A 4.486,-33.899 r180 top
R83 "0603A" 0603A 40.148,30.552 r180 top
R84 "0603A" 0603A 40.148,27.931 r180 top
R85 "0603A" 0603A 63.477,-21.935 r0 top
R86 "0603A" 0603A -12.819,-54.778 r270 bottom
R87 "0603A" 0603A -15.186,-47.582 r0 top
R88 "0603A" 0603A -9.585,-47.559 r180 top
R89 "0603A" 0603A -10.473,-54.778 r270 bottom
R90 "0603A" 0603A 36.546,-31.37 r90 bottom
R91 "0603A" 0603A 78.019,22.159 r270 top
R92 "0603A" 0603A 80.156,22.16 r270 top
R93 "0603A" 0603A 95.188,22.131 r270 top
R94 "0603A" 0603A 93.029,22.182 r270 top
R95 "0603A" 0603A 97.13,22.159 r270 top
R96 "0603A" 0603A 62.919,-45.839 r0 top
R97 "0603A" 0603A 85.685,-45.22 r90 top
RA2 "R-AR4" R-AR4 -14.792,30.278 r180 top
S1 "PUSHSW1" PUSHSW1 113.043,21.757 r90 top
S2 "SW-PB2" SW-PB2 104.393,35.405 r90 top
S3 "SW-PB2" SW-PB2 98.551,35.405 r90 top
S4 "SW-PB2" SW-PB2 92.709,35.405 r90 top
S5 "SW-PB2" SW-PB2 86.867,35.405 r90 top
S6 "SW-PB2" SW-PB2 81.025,35.405 r90 top
S7 "SW-PB2" SW-PB2 75.183,35.405 r90 top
SW2 "SWITCH8" SWITCH8 -4,0.635 r180 top
TV1 "TVB" RCA_S 104.013,-22.885 r270 top
U1 "TO-252L" TO-252L -16.414,-40.213 r180 bottom
U2 "QFN48" QFN48 87.91,13.071 r0 top
U3 "TO-252L" TO-252L 51.87,27.78 r270 top
U4 "BELL" BELL -7.738,23.894 r270 top
U5 "SO16NB" SO16NB 71.737,-43.637 r180 bottom
U6 "MTP6" MTP6 91.133,-20.35 r90 top
U7 "DM9000AE" DM9000AE 50.714,-16.995 r90 bottom
U8 "XC6218B" XC6218B 87.049,3.823 r90 bottom
U9 "USB\S" USB\S 3.056,-64.209 r180 top
U10 "TO-252L" TO-252L 51.871,17.809 r270 top
U11 "OSCLCC" OSCLCC 70.709,13.551 r0 top
X1 "Comment" SM49-12947 62.636,-17.424 r90 bottom

## Footprints (in the part's own frame and the unit in brackets; to place one, negate y for a bottom-side part, rotate by r counter-clockwise, add the part's x,y. Pads: shape width x height; smd on the part's side, far side on the other; paste and mask are expansions set on the pad)
0603A [mil]
  rect 30x40 smd: 1(0.31,0.44) 2(60.31,0.44)
  silkscreen extent -39,-30 100,31
0805 [mil]
  rect 60x50 smd: 1(-45,0) 2(45,0)
  silkscreen extent -95,-45 95,45
1206 [mil]
  rect 60x60 smd: 1(-0.06,-0.16) 2(134.94,-0.16)
  silkscreen extent -50,-50 185,50
3216A [mil]
  rect 60x50 smd: 1(0.16,0.23) 2(-109.84,0.23)
  silkscreen extent -182,-47 88,47
3314J-1 [mm]
  rect 1.6x2 smd: 1(1.15,-2) 3(-1.15,-2)
  rect 2x2 smd: 2(0,2)
  silkscreen extent -2.3,-2.3 2.3,2.3
BATTERY2 [mil]
  oval 200x140 smd: 1(0,0) 2(-600,0)
  round 55.12 hole 55.12 unplated: 3(-150,0) 4(-450,0)
  silkscreen extent -584,-284 -16,284
BELL [mil]
  rect 60x60 hole 39: 1(0,0)
  round 60 hole 39: 2(0,291.34)
  silkscreen extent -225,-77 225,373
CON80A_08_D [mm]
  rect 2x0.5 smd: 1(0,0) 2(-4.4,0) 3(0,-0.8) 4(-4.4,-0.8) 5(0,-1.6) 6(-4.4,-1.6) 7(0,-2.4) 8(-4.4,-2.4) 9(0,-3.2) 10(-4.4,-3.2) 11(0,-4) 12(-4.4,-4) 13(0,-4.8) 14(-4.4,-4.8) 15(0,-5.6) 16(-4.4,-5.6) 17(0,-6.4) 18(-4.4,-6.4) 19(0,-7.2) 20(-4.4,-7.2) 21(0,-8) 22(-4.4,-8) 23(0,-8.8) 24(-4.4,-8.8) 25(0,-9.6) 26(-4.4,-9.6) 27(0,-10.4) 28(-4.4,-10.4) 29(0,-11.2) 30(-4.4,-11.2) 31(0,-12) 32(-4.4,-12) 33(0,-12.8) 34(-4.4,-12.8) 35(0,-13.6) 36(-4.4,-13.6) 37(0,-14.4) 38(-4.4,-14.4) 39(0,-15.2) 40(-4.4,-15.2) 41(0,-16) 42(-4.4,-16) 43(0,-16.8) 44(-4.4,-16.8) 45(0,-17.6) 46(-4.4,-17.6) 47(0,-18.4) 48(-4.4,-18.4) 49(0,-19.2) 50(-4.4,-19.2) 51(0,-20) 52(-4.4,-20) 53(0,-20.8) 54(-4.4,-20.8) 55(0,-21.6) 56(-4.4,-21.6) 57(0,-22.4) 58(-4.4,-22.4) 59(0,-23.2) 60(-4.4,-23.2) 61(0,-24) 62(-4.4,-24) 63(0,-24.8) 64(-4.4,-24.8) 65(0,-25.6) 66(-4.4,-25.6) 67(0,-26.4) 68(-4.4,-26.4) 69(0,-27.2) 70(-4.4,-27.2) 71(0,-28) 72(-4.4,-28) 73(0,-28.8) 74(-4.4,-28.8) 75(0,-29.6) 76(-4.4,-29.6) 77(0,-30.4) 78(-4.4,-30.4) 79(0,-31.2) 80(-4.4,-31.2)
  round 1.2 hole 1.2 unplated: 81(-2.2,2.5)
  round 0.8 hole 0.8 unplated: 82(-2.2,-33.7)
  silkscreen extent -8.4,-34.7 4,4.69
DB9-HF [mil]
  round 70 hole 39: 1(216,521) 2(108,521) 3(0,521) 4(-108,521) 5(-216,521) 6(162,407) 7(54,407) 8(-54,407) 9(-162,407)
  round 177 hole 120: 10(-500,464) 11(500,464)
  silkscreen extent -618,-248 618,592
DM9000AE [mm]
  oval 1.2x0.22 smd: 1(-4.5,2.75) 2(-4.5,2.25) 3(-4.5,1.75) 4(-4.5,1.25) 5(-4.5,0.75) 6(-4.5,0.25) 7(-4.5,-0.25) 8(-4.5,-0.75) 9(-4.5,-1.25) 10(-4.5,-1.75) 11(-4.5,-2.25) 12(-4.5,-2.75) 25(4.5,-2.75) 26(4.5,-2.25) 27(4.5,-1.75) 28(4.5,-1.25) 29(4.5,-0.75) 30(4.5,-0.25) 31(4.5,0.25) 32(4.5,0.75) 33(4.5,1.25) 34(4.5,1.75) 35(4.5,2.25) 36(4.5,2.75)
  oval 0.22x1.2 smd: 13(-2.75,-4.5) 14(-2.25,-4.5) 15(-1.75,-4.5) 16(-1.25,-4.5) 17(-0.75,-4.5) 18(-0.25,-4.5) 19(0.25,-4.5) 20(0.75,-4.5) 21(1.25,-4.5) 22(1.75,-4.5) 23(2.25,-4.5) 24(2.75,-4.5) 37(2.75,4.5) 38(2.25,4.5) 39(1.75,4.5) 40(1.25,4.5) 41(0.75,4.5) 42(0.25,4.5) 43(-0.25,4.5) 44(-0.75,4.5) 45(-1.25,4.5) 46(-1.75,4.5) 47(-2.25,4.5) 48(-2.75,4.5)
  silkscreen extent -3.18,-3.18 3.18,3.18
DSAAAA [mil]
  round 60 hole 35: 1(100,10) 2(50,-50) 3(0,10)
  silkscreen extent -50,-100 150,50
FPC40 [mil]
  oval 9x60 smd: 1(767.72,0) 2(748.03,0) 3(728.35,0) 4(708.66,0) 5(688.98,0) 6(669.29,0) 7(649.61,0) 8(629.92,0) 9(610.24,0) 10(590.55,0) 11(570.87,0) 12(551.18,0) 13(531.5,0) 14(511.81,0) 15(492.13,0) 16(472.44,0) 17(452.76,0) 18(433.07,0) 19(413.39,0) 20(393.7,0) 21(374.02,0) 22(354.33,0) 23(334.65,0) 24(314.96,0) 25(295.28,0) 26(275.59,0) 27(255.91,0) 28(236.22,0) 29(216.54,0) 30(196.85,0) 31(177.17,0) 32(157.48,0) 33(137.8,0) 34(118.11,0) 35(98.43,0) 36(78.74,0) 37(59.06,0) 38(39.37,0) 39(19.68,0) 40(0,0)
  rect 78.74x118.11 smd: 41(-100,95) 42(867.72,95)
  silkscreen extent -100,10 868,240
HOLE157-8STAR [mm]
  round 7 hole 3.5: 1(0.006,-0.004)
  round 1 hole 0.5: 2(-2.744,-0.004) 3(0.006,2.746) 4(2.756,-0.004) 5(0.006,-2.754) 6(-1.994,1.996) 7(2.006,1.996) 8(2.006,-2.004) 9(-1.994,-2.004)
HY01 [mil]
  round 60 hole 35: 1(-100,0) 2(0,0) 3(100,0)
  silkscreen extent -140,-150 140,40
IDC20S [mm]
  round 1.3 hole 0.8: 1(0.01,-0.025) 2(0.01,1.975) 3(2.01,-0.025) 4(2.01,1.975) 5(4.01,-0.025) 6(4.01,1.975) 7(6.01,-0.025) 8(6.01,1.975) 9(8.01,-0.025) 10(8.01,1.975) 11(10.01,-0.025) 12(10.01,1.975) 13(12.01,-0.025) 14(12.01,1.975) 15(14.01,-0.025) 16(14.01,1.975) 17(16.01,-0.025) 18(16.01,1.975) 19(18.01,-0.025) 20(18.01,1.975)
  silkscreen extent -4.74,-3.78 22.76,3.47
JACK-2.5MM_B [mil]
  oval 175x80 hole 45 slot 140 at 0 deg: 1(0,0) 2(0,250)
  oval 80x175 hole 45 slot 140 at 90 deg: 3(-175,125)
  silkscreen extent -174,0 176,570
LED1206NB [mm]
  rect 2x1.5 smd: A(1.8,0) K(-1.8,0)
  silkscreen extent -3.2,-1.14 3.2,1.14
LEDX [mm]
  rect 1.4x1.27 smd: 1(-1.099,0) 2(1.111,0)
  silkscreen extent -1.9,-0.89 1.91,0.89
LEDXA [mm]
  rect 2x1.5 smd: 1(-1.8,0) 2(1.8,0)
  silkscreen extent -3.2,-1.14 3.2,1.14
MTP6 [mm]
  rect 1.016x0.6 smd: 1(0,0) 2(0,1) 3(0,2) 4(-3,2) 5(-3,1) 6(-3,0)
  silkscreen extent -2.3,-0.6 -0.7,2.6
OSCLCC [mil]
  rect 24x80 smd: 1(-100,-100) 2(100,-100) 3(100,100) 4(-100,100)
  silkscreen extent -154,-164 150,100
PHONE1 [mm]
  oval 2x2.8 hole 1 slot 2 at 90 deg: 1(-11.7,0) 2(-2.3,-1.91) 3(-8,-1.91) 4(-5.9,0) 5(0,0)
  silkscreen extent -13,-4.09 2.18,4.09
PUSHSW1 [mil]
  round 65 hole 39: 1(0.06,179.65) 2(250.06,179.65) 3(0.06,-0.35) 4(250.06,-0.35)
  silkscreen extent -45,-45 295,225
QFN48 [mm]
  oval 1.2x0.26 smd: 1(-3.6,2.75) 12(-3.6,-2.75) 25(3.6,-2.75) 36(3.6,2.75)
  rect 1.2x0.26 smd: 2(-3.6,2.25) 3(-3.6,1.75) 4(-3.6,1.25) 5(-3.6,0.75) 6(-3.6,0.25) 7(-3.6,-0.25) 8(-3.6,-0.75) 9(-3.6,-1.25) 10(-3.6,-1.75) 11(-3.6,-2.25) 26(3.6,-2.25) 27(3.6,-1.75) 28(3.6,-1.25) 29(3.6,-0.75) 30(3.6,-0.25) 31(3.6,0.25) 32(3.6,0.75) 33(3.6,1.25) 34(3.6,1.75) 35(3.6,2.25)
  oval 0.26x1.2 smd: 13(-2.75,-3.6) 24(2.75,-3.6) 37(2.75,3.6) 48(-2.75,3.6)
  rect 0.26x1.2 smd: 14(-2.25,-3.6) 15(-1.75,-3.6) 16(-1.25,-3.6) 17(-0.75,-3.6) 18(-0.25,-3.6) 19(0.25,-3.6) 20(0.75,-3.6) 21(1.25,-3.6) 22(1.75,-3.6) 23(2.25,-3.6) 38(2.25,3.6) 39(1.75,3.6) 40(1.25,3.6) 41(0.75,3.6) 42(0.25,3.6) 43(-0.25,3.6) 44(-0.75,3.6) 45(-1.25,3.6) 46(-1.75,3.6) 47(-2.25,3.6)
  rect 5x5 smd: 49(0,0)
  silkscreen extent -5.08,-4.4 4.4,4.4
R-AR4 [mm]
  rect 0.5x1.016 smd: 1(-0.008,-0.012) 2(0.881,-0.012) 3(1.77,-0.012) 4(2.659,-0.012) 5(2.659,1.512) 6(1.77,1.512) 7(0.881,1.512) 8(-0.008,1.512)
  silkscreen extent -0.52,-0.77 3.12,2.27
RAD-0.1 [mm]
  round 1.8 hole 1: 1(0,0) 2(2.54,0)
  silkscreen extent -1.27,-1.27 3.81,1.27
RCA_S [mm]
  oval 2x4 hole 1 slot 3 at 90 deg: 1(0,0) 3(3.5,0)
  oval 4x2 hole 1 slot 3 at 0 deg: 2(0,4.953)
  round 1.8 hole 1.8 unplated: 3(3.5,7.979) 4(-3.5,7.979)
  silkscreen extent -5,-1.19 5,10.95
RJ-45A12 [mm]
  rect 1.905x1.905 hole 0.9: 1(-11.25,2.18)
  round 1.905 hole 0.9: 2(-13.79,3.45) 3(-11.25,4.72) 4(-13.79,5.99) 5(-11.25,7.26) 6(-13.79,8.53) 7(-11.25,9.8) 8(-13.79,11.07) 9(0,0) 10(0,2.54) 11(0,10.71) 12(0,13.25)
  oval 2.5x2 hole 1.5: 13(-7.95,-1.07) 14(-7.95,14.41)
  round 3.302 hole 3.5: 15(-4.9,0.91) 16(-4.9,12.34)
  silkscreen extent -15.44,-1.38 5.64,14.63
SD-CARD2 [mm]
  rect 1.15x2.55 smd: 1(8.915,-0.051) 2(6.375,-0.051) 3(2.819,-0.051) 4(1.295,-0.051) 5(-1.245,-0.051) 6(-3.785,-0.051) 7(-6.325,-0.051) 8(-7.849,-0.051) 9(11.455,-0.051) 10(-11.151,-0.051) 11(4.851,-0.051)
  round 1.7 hole 1.7: 3(-10.16,-25.019) 3(13.97,-25.019)
  rect 2x2.2 smd: 12(-11.938,-22.86) 13(17.018,-21.971)
  silkscreen extent -11.94,-31.37 17.02,-1.52
SIP3S [mm]
  rect 1.3x1.3 hole 0.8: 1(-2,0)
  round 1.3 hole 0.8: 2(0,0) 3(2,0)
  silkscreen extent -3.02,-1.07 3,1
SM49-12947 [mm]
  rect 5.5x2 smd: 1(-4.75,0) 2(4.75,0)
  silkscreen extent -5.8,-2.4 5.8,2.4
SO16NB [mil]
  oval 24x74 smd: 1(-175,-113) 2(-125,-113) 3(-75,-113) 4(-25,-113) 5(25,-113) 6(75,-113) 7(125,-113) 8(175,-113) 9(175,113) 10(125,113) 11(75,113) 12(25,113) 13(-25,113) 14(-75,113) 15(-125,113) 16(-175,113)
  silkscreen extent -195,-65 195,65
SOT23 [mil]
  rect 36x36 smd: 1(-80,38) 2(-80,-37)
  rect 50x36 smd: 3(0,0)
  silkscreen extent -79,-57 5,79
SOT23T [mil]
  rect 36x36 smd: B(-37.5,-80) E(37.5,-80)
  rect 36x50 smd: C(0,0)
  silkscreen extent -55,-91 55,-1
SW-PB2 [mm]
  rect 1x1 smd: 1(-3.756,-0.007) 2(3.744,-0.007)
  silkscreen extent -3.26,-2.01 3.24,1.99
SWITCH8 [mm]
  oval 2.4x0.6 smd: 1(-4,4.445) 2(-4,3.175) 3(-4,1.905) 4(-4,0.635) 5(-4,-0.635) 6(-4,-1.905) 7(-4,-3.175) 8(-4,-4.445) 9(4,-4.445) 10(4,-3.175) 11(4,-1.905) 12(4,-0.635) 13(4,0.635) 14(4,1.905) 15(4,3.175) 16(4,4.445)
  silkscreen extent -5.4,-5.08 5.4,5.08
SWITCH_A [mm]
  round 1.5 hole 1: 1(2.356,2.25) 2(4.356,2.25) 3(6.356,2.25)
  oval 1.5x2 hole 0.9 slot 1.4 at 90 deg: 4(0,2.25) 5(8.7,2.25)
  silkscreen extent 0,0 8.71,4.5
TO-252L [mm]
  rect 1.5x1.5 smd: 1(2.286,0) 2(-2.286,0) 3(0,0)
  rect 4.572x2.794 smd: 4(0,6.858)
  silkscreen extent -3.5,1.78 3.5,4.95
USB-B2 [mil]
  round 78.74 hole 35.43: 1(0,-280) 4(0,0)
  round 62.99 hole 31.5: 2(0,-180) 3(0,-100)
  round 129.92 hole 82.68: 5(94.49,125) 6(94.49,-405)
  silkscreen extent -50,-473 500,210
USB\S [mm]
  rect 0.508x2.3 smd: 1(1.6,-8.5)
  rect 0.508x2.54 smd: 2(0.8,-8.4) 3(0,-8.4) 4(-0.8,-8.4) 5(-1.6,-8.4)
  rect 2.032x2.54 smd: 6(4.445,-8.4) 11(-4.445,-8.4)
  rect 1.9x1.95 smd: 7(-4.5,-3.2) 8(4.4,-3.2)
  round 0.94 hole 0.94 unplated: 9(-2.2,-5.9) 10(2.2,-5.9)
  silkscreen extent -3.85,-9.2 3.85,0
XC6218B [mm]
  oval 0.6x1.3 smd: 1(-0.95,-1.1) 2(0,-1.1) 3(0.95,-1.1) 4(0.95,1.1) 5(-0.95,1.1)
  silkscreen extent -1.9,-1.39 1.45,1
ZSB [mm]
  silkscreen extent -2.29,-2.29 2.29,2.29

## Free pads (board coordinates)
  round 1.016 smd paste+0 mask+1.016: 0(103.734,24.892) 1(-14.529,-32.664)
  round 1.016 smd far side paste+0 mask+1.016: 1(-17.831,16.586) 1(88.29,-30.302)

## Via types
v1: diameter 0.61, hole 0.305, Top to Bottom, tented both sides, 719 vias
v2: diameter 1.27, hole 0.635, Top to Bottom, tented both sides, 21 vias

## Nets (pads, with @x,y where several pads share a name; then routed paths per layer and width w, separated by ;. In a path a pad name is that pad's centre, name@x,y a point inside that pad or via, vN(x,y) a via of type N, cw(c..) or ccw(c..) an arc to the next point about the centre after c; other vN are vias at no path point)
$$$1947: J5.2 J11.1 | length 9.5
  Bottom w1.524: J11.1@101.253,-51.036 101.253,-60.563 J5.2@101.255,-60.565
$$$2765: CON1.30 R15.1 R16.1 | length 23.9
  Top w0.152: v1(50.508,-58.61) 51.424,-57.694 51.424,-53.542 50.896,-53.014 CON1.30@50.896,-52.199 ; v1(53.157,-61.259) 59.356,-61.259 ; 59.357,-61.26 v1(62.145,-61.26)
  Bottom w0.152: v1(50.508,-58.61) v1(53.157,-61.259) ; v1(62.145,-61.26) R15.1@64.452,-61.261 R15.1@64.452,-61.261
  Bottom w0.254: R16.1@64.451,-59.431 R16.1@64.451,-59.431 R15.1@64.452,-61.261
$$$3011: J9.1 R6.1 | length 7.7
  Top w0.381: J9.1@2.382,31.298 4.362,29.318 R6.1@9.235,29.318
$$$5018: CN1.3 R88.1 R89.1 | length 8.6
  Top w0.152: CN1.3@-10.749,-51.575 -10.749,-48.726 R88.1@-9.593,-47.57
  Bottom w0.152: CN1.3@-10.749,-51.575 -10.749,-54.786 -10.749,-54.9 -10.484,-54.9 -10.239,-54.9 -10.287,-54.852 R89.1@-10.483,-54.852
$$$5019: CN1.2 R86.1 R87.1 | length 8.2
  Top w0.152: R87.1@-15.178,-47.571 -12.781,-49.968 CN1.2@-12.781,-51.575
  Bottom w0.152: R86.1@-12.83,-54.786 -12.781,-54.736 CN1.2@-12.781,-51.575
$$$5860: R42.1 U7.1 | length 5.8
  Bottom w0.229: U7.1@53.464,-21.495 53.464,-22.103 54.153,-22.792 54.153,-25.375 54.737,-25.959 R42.1@55.524,-25.959
$$$5989: C14.2 R34.1 R35.2 | length 4.8
  Top w0.254: C14.2@85.438,-23.366 87.022,-21.783 87.022,-21.351 R34.1@86.962,-21.291 ; R35.2@86.955,-19.463 86.962,-19.47 R34.1@86.962,-21.291 ; R34.1@86.962,-21.459 R34.1@86.962,-21.291
$$$5995: C14.1 U6.4 | length 2.2
  Top w0.254: C14.1@86.962,-23.366 86.978,-23.35 U6.4@89.133,-23.35
$$$6333: C18.1 U6.2 | length 2.7
  Top w0.254: v1(90.134,-21.478) U6.2@90.133,-20.35
  Bottom w0.254: C18.1@89.754,-20.337 90.096,-20.337 90.134,-20.3 v1(90.134,-21.478)
$$$6335: C19.1 U6.3 | length 3.5
  Top w0.254: v1(89.133,-21.981) U6.3@89.133,-20.35
  Bottom w0.254: v1(89.133,-21.981) 89.133,-22.997 89.75,-22.997 89.754,-23.001 C19.1@89.754,-23.182
$$$6392: R36.2 U6.1 | length 2
  Top w0.254: R36.2@91.09,-18.389 R36.2@91.133,-18.432
  Top w0.508: U6.1@91.133,-20.35 R36.2@91.133,-18.432
$$$6421: C18.2 C19.2 R37.1 | length 8.3
  Bottom w0.254: C19.2@92.548,-23.182 C18.2@92.548,-20.337 95.126,-20.337 97.086,-22.297 97.142,-22.297 R37.1@97.194,-22.245
$$$6436: R37.2 TV1.1 | length 5.8
  Bottom w0.254: R37.2@98.718,-22.245 99.384,-22.911 103.683,-22.911 103.861,-22.733 TV1.1@104.013,-22.581 ; TV1.1@103.802,-22.245 TV1.1@103.856,-22.191
$$$6443: J2.5 R96.2 | length 7.2
  Top w0.152: R96.2@64.451,-45.828 65.889,-44.39 J2.5@65.889,-39.231
$$$6493: J1.66 R67.1 | length 12.1
  Top w0.152: R67.1@65.016,-28.005 65.016,-26.937 66.276,-25.677 72.602,-25.677 73.557,-26.631 J1.66@75.088,-26.631
$$$7278: C33.1 C58.1 CN1.5 CN1.6 | length 21.6
  Top w0.508: CN1.6@-18.496,-53.975 CN1.5@-5.034,-53.975
  Bottom w0.152: CN1.6@-18.634,-54.039 -18.405,-53.81 -18.405,-53.884 CN1.6@-18.496,-53.975
  Bottom w0.381: C58.1@-18.634,-57.778 CN1.6@-18.634,-54.039 ; C33.1@-5.081,-57.823 -5.058,-57.801 -5.034,-57.777 CN1.5@-5.034,-53.975
$$$7649: LED1.2 R80.2 | length 5.5
  Top w0.381: LED1.2@-2.198,-26.289 -2.213,-26.289 -2.354,-26.43 R80.2@2.954,-26.43
$$$7682: LED2.2 R55.2 | length 5.4
  Top w0.381: LED2.2@-2.198,-28.829 -2.198,-28.755 -2.25,-28.704 R55.2@2.954,-28.704
$$$7685: LED3.2 R57.2 | length 5.3
  Top w0.381: LED3.2@-2.198,-31.369 -2.198,-31.319 -2.075,-31.195 R57.2@2.954,-31.195
$$$7692: LED4.2 R82.2 | length 5.2
  Top w0.381: LED4.2@-2.198,-33.909 -2.112,-33.823 -1.256,-33.823 -1.255,-33.824 R82.2@2.954,-33.824
$$$10046: R90.2 U7.40 | length 36.8
  Top w0.152: v1(36.079,-16.899) 37.842,-16.899 40.704,-19.761 51.03,-19.761 v1(51.718,-19.073)
  Bottom w0.152: v1(36.079,-16.899) 36.821,-17.64 36.821,-22.451 35.757,-23.514 35.757,-25.459 36.586,-26.288 36.586,-29.81 R90.2@36.557,-29.838 ; v1(51.718,-19.073) 52.62,-18.171 52.62,-16.865 53.739,-15.745 U7.40@55.214,-15.745
$$$10163: R27.1 U8.3 | length 2.7
  Bottom w0.381: R27.1@83.566,5.461 84.254,4.773 U8.3@85.949,4.773
$$$10650: J10.12 R48.1 | length 4
  Bottom w0.254: J10.12@109.35,-29.877 109.695,-29.877 R48.1@112.247,-32.428
$$$11428: JP1.3 R83.1 R84.1 | length 13.4
  Top w0.152: R83.1@40.14,30.541 R84.1@40.14,27.92 41.539,29.319 v1(43.257,29.319)
  Bottom w0.152: v1(43.257,29.319) 43.257,34.639 JP1.3@43.257,36.412
$$$13917: Q5.B R1.1 | length 3
  Bottom w0.381: Q5.B@-3.769,18.111 -1.792,18.111 R1.1@-1.098,18.805
$$$14023: Q5.C U4.2 | length 6.4
  Bottom w0.508: Q5.C@-4.721,20.143 -4.721,20.949 -1.776,23.894 U4.2@-0.338,23.894
$$$14229: C20.2 U7.43 X1.2 | length 11.2
  Bottom w0.203: U7.43@55.214,-17.245 58.188,-17.245 59.204,-16.229 59.26,-16.286 C20.2@59.26,-16.381 61.902,-16.381 62.636,-15.646 X1.2@62.636,-12.674
$$$14243: C69.2 U7.44 X1.1 | length 11.1
  Bottom w0.203: U7.44@55.214,-17.745 58.213,-17.745 C69.2@59.261,-18.793 ; C69.2@59.3,-18.851 C69.2@59.242,-18.793 C69.2@59.261,-18.793 ; X1.1@62.636,-22.174 62.636,-19.202 62.227,-18.793 C69.2@59.261,-18.793
$$$15671: R25.2 U9.3 | length 5.6
  Top w0.152: U9.3@3.056,-55.809 3.056,-50.943 R25.2@3.551,-50.448
$$$15673: R26.2 U9.2 | length 8.8
  Top w0.152: U9.2@2.256,-55.809 2.256,-48.865 R26.2@3.551,-47.57
$$$17189: P1.2 U5.14 | length 15.2
  Top w0.254: v1(73.642,-44.46) 79.358,-50.175 P1.2@79.358,-53.551
  Bottom w0.254: v1(73.642,-44.46) U5.14@73.642,-40.767
$$$17190: P1.3 U5.13 | length 14.5
  Top w0.254: v1(72.372,-44.524) 72.372,-46.21 76.615,-50.453 P1.3@76.615,-53.551
  Bottom w0.254: v1(72.372,-44.524) U5.13@72.372,-40.767
$$$18461: C36.2 J14.1 J14.2 | length 18.9
  Top w0.229: C36.2@96.419,5.025 101.596,5.025 101.973,5.402 J14.1@102.006,5.436
  Top w0.254: J14.1@102.006,5.436 103.886,7.315 108.839,7.315 111.43,4.724 111.43,3.526 111.43,3.268 J14.2@111.137,2.974
$$$18465: C37.2 J14.3 J14.4 | length 12.3
  Top w0.254: C37.2@96.419,3.13 105.244,3.13 J14.3@105.64,3.526 105.83,3.526 J14.4@107.74,5.436
$$$18957: 
$$$20942: B2.2 C12.1 C28.1 CN1.1 | length 15.1
  Bottom w0.889: CN1.1@-15.321,-51.575 -15.321,-46.477 C28.1@-13.016,-44.172 -11.329,-45.858 -10.51,-45.858 C12.1@-10.447,-45.921 -9.511,-46.857 -7.366,-46.857 B2.2@-7.359,-46.85
$$$21133: BAT1.1 D1.1 | length 12.8
  Top w0.508: v1(2.736,-17.153) 4.555,-15.334 4.868,-15.334 BAT1.1@5.01,-15.476
  Bottom w0.508: v1(2.736,-17.153) 3.108,-16.781 3.108,-11.599 D1.1@5.944,-8.763
$$$22164: J7.1 J7.2 J7.3 J7.4 R71.2 | length 18.2
  Top w0.254: R71.2@96.119,-2.834 R71.2@96.419,-2.834 98.954,-2.834 99.346,-3.226 101.323,-3.226 101.597,-3.5 101.904,-3.807 102.023,-3.807 102.756,-3.807 103.933,-4.983 J7.3@105.723,-4.983 106.003,-4.983 107.868,-3.118 107.913,-3.073 109.513,-3.073 111.137,-4.697 111.137,-4.983 J7.2@111.137,-5.55
$$$22370: C70.2 R43.1 R44.1 | length 4.7
  Bottom w0.254: C70.2@87.367,-42.682 89.637,-42.682 R44.1@89.66,-42.705 91.191,-41.174 R43.1@91.191,-40.94
$$$22371: C75.2 R45.2 R46.2 | length 5
  Bottom w0.254: C75.2@87.27,-38.206 R46.2@89.668,-38.207 ; R46.2@89.668,-38.207 89.668,-37.81 89.663,-37.805 R45.2@91.184,-36.284
$$$23087: J10.9 R47.2 | length 3.3
  Bottom w0.254: J10.9@109.35,-43.127 112.423,-43.127 112.296,-43.253 R47.2@112.247,-43.253
$$$27921: P1.8 U5.7 | length 17.1
  Top w0.254: v1(68.555,-44.526) 69.286,-44.526 75.243,-50.483 P1.8@75.243,-56.446
  Bottom w0.254: U5.7@68.562,-46.507 v1@68.562,-44.526
$$$27927: P1.7 U5.8 | length 22.5
  Top w0.254: v1(67.285,-44.501) 67.945,-43.84 72.771,-43.84 73.076,-44.145 73.076,-45.212 77.986,-50.122 P1.7@77.986,-56.446
  Bottom w0.254: U5.8@67.292,-46.507 v1@67.292,-44.501
$$$28153: C85.2 D3.K JP1.18 | length 8.1
  Bottom w0.508: D3.K@63.771,38.073 D3.K@63.856,37.988
  Bottom w0.635: JP1.18@57.257,38.412 58.494,39.649 60.452,39.649 61.475,38.627 C85.2@61.475,38.073 D3.K@63.771,38.073
$$$28317: JP1.5 R85.1 | length 71.6
  Top w0.152: v1(61.036,-14.58) 61.036,-19.475 R85.1@63.485,-21.924
  Bottom w0.152: JP1.5@45.257,36.412 45.257,34.251 50.575,28.934 57.616,28.934 62.944,23.606 62.944,-6.728 61.036,-8.636 v1(61.036,-14.58)
$$$28405: D1.3 R17.2 | length 4.6
  Bottom w0.508: D1.3@7.976,-7.798 8.583,-8.405 R17.2@8.583,-12.144
$$$30039: R60.2 U2.2 | length 5
  Top w0.203: R60.2@79.607,15.975 80.269,15.975 80.923,15.321 U2.2@84.31,15.321
$$$30047: R60.1 U11.3 | length 5.5
  Top w0.203: U11.3@73.249,16.091 73.249,16.207 73.155,16.302 73.155,15.975 R60.1@78.083,15.975
$$$30108: R61.2 U11.1 | length 7.4
  Top w0.254: R61.2@62.291,14.697 62.343,14.749 63.278,14.749 66.995,11.032 68.148,11.032 U11.1@68.169,11.011
$$$30460: R62.2 U2.3 | length 5.1
  Top w0.203: R62.2@79.607,14.123 79.657,14.173 80.535,14.173 81.326,14.964 82.991,14.964 83.134,14.821 U2.3@84.31,14.821
$$$30855: C35.1 U2.21 | length 13.4
  Top w0.254: U2.21@89.16,9.471 89.16,5.455 90.775,3.84 90.775,0.78 89.566,-0.429 C35.1@89.566,-2.783
$$$31102: R2.1 U4.1 | length 3.7
  Bottom w0.508: R2.1@-8.151,20.336 -8.122,20.365 -8.122,21.601 -7.738,21.985 U4.1@-7.738,23.894
$$$31206: C36.1 U2.24 | length 9.3
  Top w0.229: U2.24@90.66,9.471 90.66,5.733 92.583,3.81 93.68,3.81 C36.1@94.895,5.025
$$$31213: C37.1 U2.23 | length 9.9
  Top w0.229: U2.23@90.16,9.471 90.16,5.471 92.394,3.237 94.895,3.237 95.002,3.237 C37.1@95.109,3.13
$$$31355: C39.1 U2.32 | length 5.9
  Top w0.254: U2.32@91.51,13.821 93.168,13.821 95.228,15.881 96.121,15.881 96.203,15.8 96.203,15.825 96.401,16.023 C39.1@96.457,16.023
$$$31366: C41.1 U2.27 | length 5.4
  Top w0.254: U2.27@91.51,11.321 94.125,11.321 95.111,12.307 C41.1@96.457,12.307
$$$31709: C46.1 U2.39 | length 39.9
  Top w0.254: C46.1@88.698,-10.024 88.663,-9.989 88.529,-9.989 88.529,-6.798 89.106,-6.221 92.058,-6.221 93.32,-7.483 v1(94.656,-7.483) ; U2.39@89.66,16.671 v1(89.66,18.393)
  Bottom w0.254: v1(89.66,18.393) 94.656,13.397 v1(94.656,-7.483)
$$$31712: C44.1 U2.41 | length 40.4
  Top w0.254: C44.1@88.632,-13.356 89.687,-12.301 v1@94.031,-12.301 ; U2.41@88.66,16.671 v1(88.66,18.345)
  Bottom w0.254: v1(88.66,18.345) 94.031,12.974 v1@94.031,-12.301
  other v1: 94.031,-12.319
$$$31855: R63.1 U2.45 | length 4.1
  Top w0.254: R63.1@86.197,20.62 R63.1@86.197,20.62 86.198,19.769 86.66,19.307 U2.45@86.66,16.671
$$$32385: R28.2 U8.5 | length 2.1
  Bottom w0.508: U8.5@88.149,2.873 89.95,2.873 R28.2@90.137,3.059
$$$32386: C67.1 U8.4 | length 2.3
  Bottom w0.508: U8.4@88.149,4.773 89.558,4.773 C67.1@90.17,5.385
$$$32413: C64.2 U5.2 | length 8.1
  Bottom w0.381: U5.2@74.912,-46.507 74.912,-46.191 74.9,-46.178 74.9,-45.353 75.38,-44.873 76.805,-44.873 77.544,-45.612 77.544,-47.778 C64.2@78.674,-48.908
$$$32420: C63.1 U5.6 | length 2.9
  Bottom w0.254: C63.1@68.618,-48.909 69.834,-47.694 69.834,-46.509 U5.6@69.832,-46.507
$$$32468: C57.2 U5.1 | length 2.5
  Bottom w0.254: U5.1@76.182,-46.507 76.175,-46.579 76.175,-48.909 C57.2@76.254,-48.909
$$$32471: C57.1 U5.3 | length 2.9
  Bottom w0.254: U5.3@73.642,-46.507 73.642,-47.688 74.73,-48.776 C57.1@74.73,-48.909
$$$32474: C56.2 U5.4 | length 2.4
  Bottom w0.254: C56.2@72.337,-48.909 72.372,-48.873 U5.4@72.372,-46.507
$$$32490: C56.1 U5.5 | length 2.5
  Bottom w0.254: C56.1@70.813,-48.909 70.813,-47.897 71.102,-47.607 U5.5@71.102,-46.507
AC97_BITCLK: J1.34 U2.6 | length 38.1
  Top w0.152: v1(72.802,-13.831) J1.34@75.088,-13.831 ; v1(76.962,6.35) 76.962,12.09 77.889,13.017 81.904,13.017 82.208,13.321 U2.6@84.31,13.321
  Bottom w0.152: v1(72.802,-13.831) 72.388,-13.417 72.388,-1.285 76.962,3.289 v1(76.962,6.35)
AC97_RSTN: J1.15 U2.11 | length 23.9
  Top w0.152: J1.15@79.488,-6.631 v1(82.77,-6.631) ; v1(80.823,6.502) 80.823,8.179 83.465,10.821 U2.11@84.31,10.821
  Bottom w0.152: v1(80.823,6.502) 80.269,5.949 80.269,-2.266 82.77,-4.767 v1(82.77,-6.631)
AC97_SDI: J1.17 U2.8 | length 29.2
  Top w0.152: v1@78.886,6.801 78.886,12.262 79.295,12.67 81.084,12.67 81.576,12.178 83.171,12.178 83.315,12.321 U2.8@84.31,12.321 ; J1.17@79.488,-7.431 v1(81.929,-7.431)
  Bottom w0.152: v1(78.892,6.782) 79.878,5.796 79.878,-2.56 81.929,-4.612 v1(81.929,-7.431)